# Allegro board A733_REF_LPDDR5_315BALL_32X1_D6L_V1_0_20240702.brd
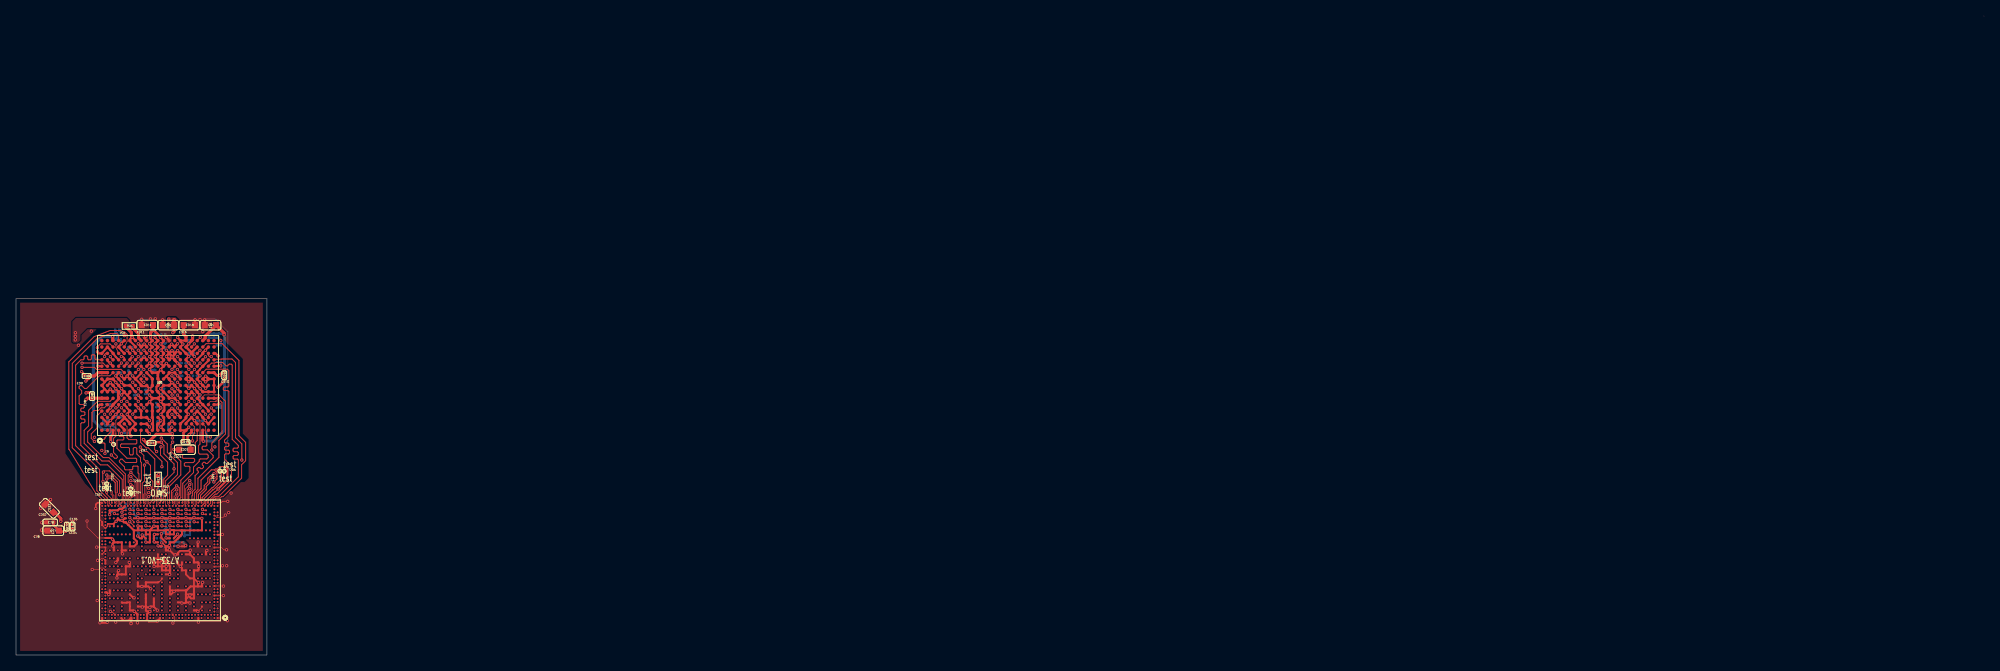
[diagram p0: board, top side]
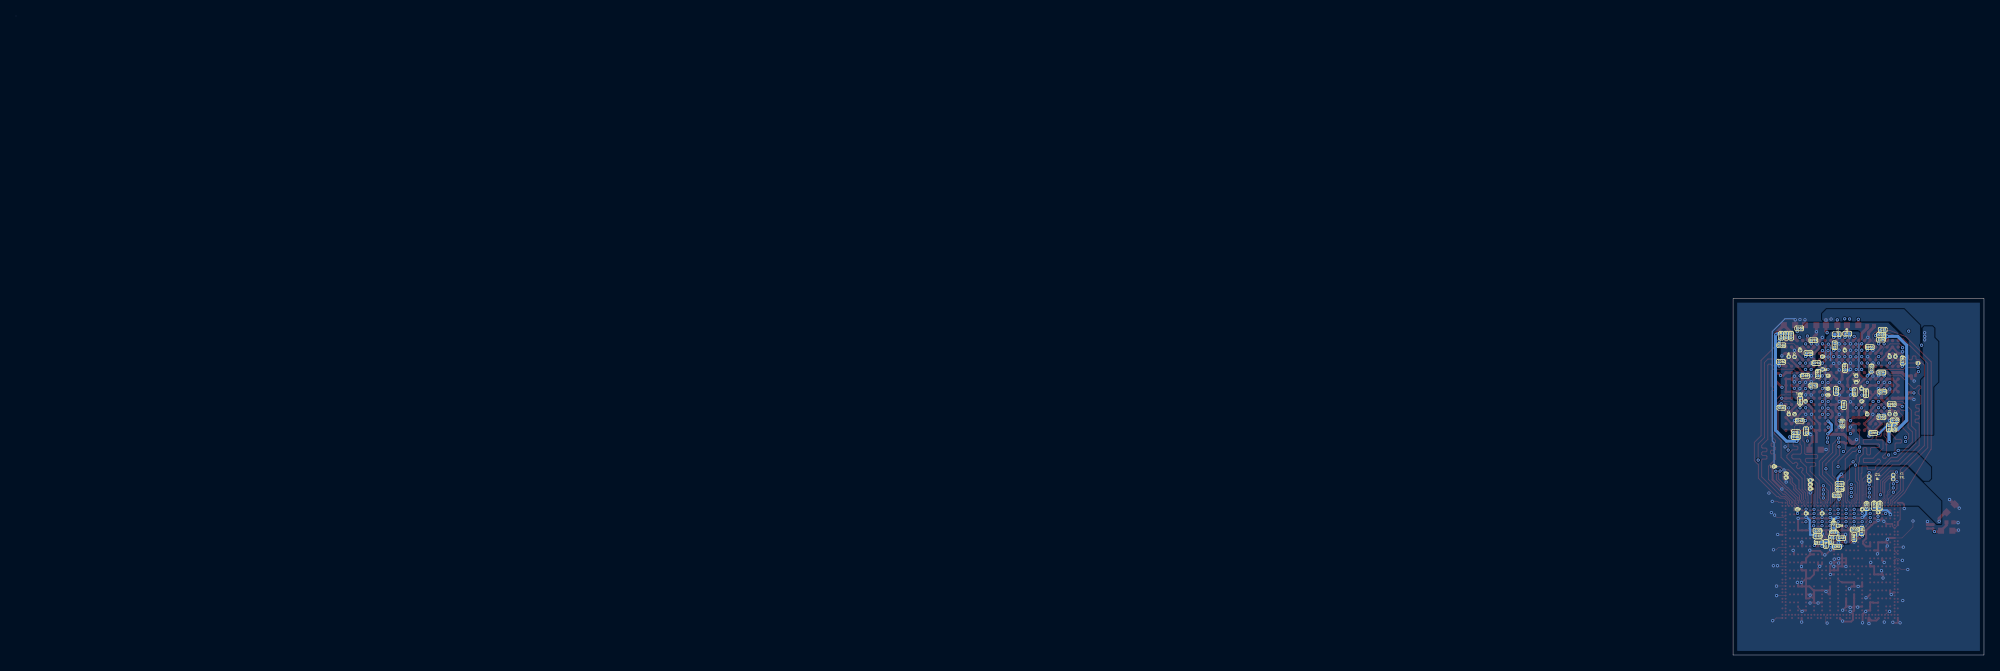
[diagram p1: board, bottom side, seen from below]

Outline 245.57 x 79.82 mm; copper layers: TOP, L2GND, L3, L4, L5GND, BOTTOM. Coordinates in mm from the lower left corner of the outline.
Outline path: 245.57,79.82 245.57,79.81 ; 0,44.52 0,0 31.31,0 31.31,44.52 0,44.52

## Design rules (mm)
net group WCK0-A: nets WCK0N-A WCK0P-A
net group WCK0-B: nets WCK0N-B WCK0P-B
net group WCK1-A: nets WCK1N-A WCK1P-A
net group WCK1-B: nets WCK1N-B WCK1P-B

## Placement (name value [footprint] x y rotation side)
C77  22uF  [C0603]  4.65 15.53 180 top
C78  4.7uF  [C0402]  4.26 16.57 180 top
C79  1uF  [C0201]  19.73 13.88 90 bottom
C80  1uF  [C0201]  16.17 14.71 270 bottom
C81  100nF  [C0201]  15.27 15.48 90 bottom
C82  100nF  [C0201]  20.63 14.08 180 bottom
C83  2.2uF  [C0201]  18.33 13.52 0 bottom
C134  1uF  [C0201]  7.05 16.05 90 top
C135  1uF  [C0201]  6.34 16.04 90 top
CD1  10uF  [C0603]  24.27 41.2 180 top
CD2  100nF  [C0201]  12.64 40.63 0 bottom
CD3  100nF  [C0201]  23.49 27.23 0 bottom
CD4  100nF  [C0201]  11.17 28.42 90 bottom
CD5  100nF  [C0201]  23.49 27.84 0 bottom
CD6  10uF  [C0603]  19.01 41.21 180 top
CD7  4.7uF  [C0201]  16.9 26.47 0 top
CD8  2.2uF  [C0201]  9.48 32.33 90 top
CD9  100nF  [C0201]  8.8 34.86 180 top
CD10  100nF  [C0201]  25.99 34.95 270 top
CD11  10uF  [C0603]  16.39 41.21 180 top
CD12  4.7uF  [C0201]  16.12 32.86 90 bottom
CD13  2.2uF  [C0201]  18.38 40.07 0 bottom
CD14  100nF  [C0201]  18.63 38.68 270 bottom
CD15  100nF  [C0201]  17.35 35.84 90 bottom
CD16  10uF  [C0603]  21.62 41.2 0 top
CD17  4.7uF  [C0201]  22.21 27.96 270 bottom
CD18  2.2uF  [C0201]  14.04 35.76 270 bottom
CD19  100nF  [C0201]  21.29 39.32 0 bottom
CD20  100nF  [C0201]  11.16 29.31 180 bottom
CD21  10uF  [C0603]  21.07 25.64 0 top
CD22  4.7uF  [C0201]  18.38 19.95 180 bottom
CD23  2.2uF  [C0201]  20.77 14.85 0 bottom
CD24  100nF  [C0201]  19.12 14.39 270 bottom
CD25  100nF  [C0201]  20.77 15.53 0 bottom
CD26  1uF  [C0201]  18.76 16.15 90 bottom
CD27  100nF  [C0201]  18.75 15.25 0 bottom
CD32  10uF  [C0603]  4.16 18.32 135 top
CD33  4.7uF  [C0201]  13.71 18.63 270 bottom
CD34  2.2uF  [C0201]  17.82 14.59 0 bottom
CD35  100nF  [C0201]  14.65 18.58 270 bottom
CD36  100nF  [C0201]  18 20.73 0 bottom
CD37  100nF  [C0201]  11.85 28.42 90 bottom
CD38  100nF  [C0201]  25.31 39.88 270 bottom
CD39  100nF  [C0201]  12.84 40 0 bottom
CD40  100nF  [C0201]  24.67 39.89 270 bottom
CD41  100nF  [C0201]  12.84 39.4 0 bottom
CD42  100nF  [C0201]  24.06 39.89 270 bottom
CD43  100nF  [C0201]  21.31 33.65 0 bottom
CD44  100nF  [C0201]  12.81 35.27 180 bottom
CD45  100nF  [C0201]  12.68 32.9 180 bottom
CD46  100nF  [C0201]  17.66 28.9 90 bottom
CD47  100nF  [C0201]  18.47 32.98 90 bottom
CD48  100nF  [C0201]  17.06 40.14 0 bottom
CD49  100nF  [C0201]  21.15 26.63 0 top
CD50  100nF  [C0201]  21.9 37.72 0 bottom
CD51  100nF  [C0201]  12.8 29.7 0 bottom
CD52  100nF  [C0201]  23 29.26 180 bottom
CD53  100nF  [C0201]  14.25 38.46 0 bottom
CD54  100nF  [C0201]  20.92 36.46 180 bottom
CD55  1uF  [C0201]  16.14 15.66 180 bottom
CD56  1uF  [C0201]  13.01 18.63 270 bottom
CD57  1uF  [C0201]  18.01 21.38 0 bottom
CD58  2.2uF  [C0201]  22.94 31.79 90 bottom
CD59  1uF  [C0201]  23.06 40.79 0 bottom
CD60  1uF  [C0201]  25.32 36.61 0 bottom
CD61  1uF  [C0201]  25.28 30.89 0 bottom
CD62  1uF  [C0201]  10.15 36.77 270 bottom
CD63  2.2uF  [C0201]  11.51 31.32 0 bottom
CD64  100nF  [C0201]  13.82 27.74 180 bottom
CD65  100nF  [C0201]  25.29 38.69 0 bottom
CD66  1uF  [C0201]  14.72 32.7 270 bottom
CD67  1uF  [C0201]  17.49 31.23 270 bottom
CD68  1uF  [C0201]  20.73 35.12 270 bottom
CD69  1uF  [C0201]  22.33 34.88 0 bottom
RD1  240R-1%  [R0402]  14.15 41.11 180 top
RD2  120R-1%  [R0402]  17.73 21.93 90 top
T3  test  [TP30]  13.21 17.84 0 bottom
T4  test  [TP30]  15.2 18.19 0 bottom
T5  test  [TP30]  22.26 31.68 0 bottom
T6  test  [TP30]  23.64 30.08 0 bottom
T7  test  [TP30]  11.32 22.48 0 bottom
T8  test  [TP30]  14.32 21.78 0 bottom
T9  test  [TP30]  12.17 26.31 180 top
T10  test  [TP30]  24.36 30.09 0 bottom
T11  test  [TP30]  11.32 21.97 0 bottom
T12  test  [TP30]  14.32 22.28 0 bottom
T13  test  [TP30]  11.77 30.09 0 bottom
T14  test  [TP30]  8.24 36.45 0 bottom
T15  test  [TP30]  20.2 17.69 0 bottom
T16  test  [TP30]  22.2 17.7 0 bottom
T17  test  [TP30]  11.05 30.07 0 bottom
T18  test  [TP30]  11.77 37.27 0 bottom
T19  test  [TP30]  21.68 21.27 0 bottom
T20  test  [TP30]  24.7 22.15 0 bottom
T21  test  [TP30]  22.95 38.06 0 bottom
T22  test  [TP30]  11.05 37.28 0 bottom
T23  test  [TP30]  23.64 37.25 0 bottom
T24  test  [TP30]  17.35 38.06 0 bottom
T26  test  [TP30]  24.36 37.27 0 bottom
T27  SATO  [TP30]  17.89 20.26 180 top
T28  SDTO  [TP30]  18.2 16.13 180 bottom
T29  test  [TP30]  14.57 30.08 0 bottom
T30  test  [TP30]  20.16 37.27 0 bottom
T33  test  [TP30]  24.7 22.66 0 bottom
T34  test  [TP30]  15.28 33.27 0 bottom
T35  test  [TP30]  19.45 34.88 0 bottom
T36  test  [TP30]  21.68 20.76 0 bottom
T37  test  [TP30]  15.26 31.69 0 bottom
T38  test  [TP30]  20.14 35.67 0 bottom
T39  test  [TP30]  15.94 34.87 0 bottom
T179  test  [TP30]  21.68 21.78 180 bottom
T180  test  [TP30]  19.47 32.47 180 bottom
T181  test  [TP30]  19.46 33.26 180 bottom
T182  test  [TP30]  15.94 34.07 180 bottom
T183  test  [TP30]  22.96 32.48 180 bottom
T199  test  [TP30]  26.19 23.55 180 bottom
T200  test  [TP30]  23.27 18.19 180 bottom
T201  test  [TP30]  11.32 20.87 0 top
T202  test  [TP30]  11.31 21.38 0 top
T203  test  [TP30]  14.3 20.76 0 top
T204  test  [TP30]  14.31 20.25 0 top
T205  test  [TP30]  25.45 22.98 0 top
T206  test  [TP30]  25.97 22.96 0 top
U1  A733-V0.1  [BGA570P40_50B1500_1500H95]  17.95 11.82 180 top
UD1  LPDDR5_FBGA315  [BGA315P70_80B1500_1240H110]  17.71 33.67 90 top

## Library data of the parts
C77-C83 C134 C135 CD1-CD27 CD32-CD69 = C-C0402
RD1 RD2 = R-R0402-1%
T3-T24 T26-T30 T33-T39 T179-T183 T199-T206 = TestPoint-on wire
U1 = A733-V1.0
UD1 = LPDDR5_FBGA315

## Footprints (pads in the part's own frame, mm; a bottom-side part is the same pattern mirrored in y, then rotated)
BGA315P70_80B1500_1240H110
  round 0.43 smd: A1(-5.6,7) A2(-4.8,7) A3(-4,7) A4(-3.2,7) A5(-2.4,7) A6(-1.6,7) A7(-0.8,7) A8(0,7) A9(0.8,7) A10(1.6,7) A11(2.4,7) A12(3.2,7) A13(4,7) A14(4.8,7) A15(5.6,7) AA1(-5.6,-7) AA2(-4.8,-7) AA3(-4,-7) AA4(-3.2,-7) AA5(-2.4,-7) AA6(-1.6,-7) AA7(-0.8,-7) AA8(0,-7) AA9(0.8,-7) AA10(1.6,-7) AA11(2.4,-7) AA12(3.2,-7) AA13(4,-7) AA14(4.8,-7) AA15(5.6,-7) B1(-5.6,6.3) B2(-4.8,6.3) B3(-4,6.3) B4(-3.2,6.3) B5(-2.4,6.3) B6(-1.6,6.3) B7(-0.8,6.3) B8(0,6.3) B9(0.8,6.3) B10(1.6,6.3) B11(2.4,6.3) B12(3.2,6.3) B13(4,6.3) B14(4.8,6.3) B15(5.6,6.3) C1(-5.6,5.6) C2(-4.8,5.6) C3(-4,5.6) C4(-3.2,5.6) C5(-2.4,5.6) C6(-1.6,5.6) C7(-0.8,5.6) C8(0,5.6) C9(0.8,5.6) C10(1.6,5.6) C11(2.4,5.6) C12(3.2,5.6) C13(4,5.6) C14(4.8,5.6) C15(5.6,5.6) D1(-5.6,4.9) D2(-4.8,4.9) D3(-4,4.9) D4(-3.2,4.9) D5(-2.4,4.9) D6(-1.6,4.9) D7(-0.8,4.9) D8(0,4.9) D9(0.8,4.9) D10(1.6,4.9) D11(2.4,4.9) D12(3.2,4.9) D13(4,4.9) D14(4.8,4.9) D15(5.6,4.9) E1(-5.6,4.2) E2(-4.8,4.2) E3(-4,4.2) E4(-3.2,4.2) E5(-2.4,4.2) E6(-1.6,4.2) E7(-0.8,4.2) E8(0,4.2) E9(0.8,4.2) E10(1.6,4.2) E11(2.4,4.2) E12(3.2,4.2) E13(4,4.2) E14(4.8,4.2) E15(5.6,4.2) F1(-5.6,3.5) F2(-4.8,3.5) F3(-4,3.5) F4(-3.2,3.5) F5(-2.4,3.5) F6(-1.6,3.5) F7(-0.8,3.5) F8(0,3.5) F9(0.8,3.5) F10(1.6,3.5) F11(2.4,3.5) F12(3.2,3.5) F13(4,3.5) F14(4.8,3.5) F15(5.6,3.5) G1(-5.6,2.8) G2(-4.8,2.8) G3(-4,2.8) G4(-3.2,2.8) G5(-2.4,2.8) G6(-1.6,2.8) G7(-0.8,2.8) G8(0,2.8) G9(0.8,2.8) G10(1.6,2.8) G11(2.4,2.8) G12(3.2,2.8) G13(4,2.8) G14(4.8,2.8) G15(5.6,2.8) H1(-5.6,2.1) H2(-4.8,2.1) H3(-4,2.1) H4(-3.2,2.1) H5(-2.4,2.1) H6(-1.6,2.1) H7(-0.8,2.1) H8(0,2.1) H9(0.8,2.1) H10(1.6,2.1) H11(2.4,2.1) H12(3.2,2.1) H13(4,2.1) H14(4.8,2.1) H15(5.6,2.1) J1(-5.6,1.4) J2(-4.8,1.4) J3(-4,1.4) J4(-3.2,1.4) J5(-2.4,1.4) J6(-1.6,1.4) J7(-0.8,1.4) J8(0,1.4) J9(0.8,1.4) J10(1.6,1.4) J11(2.4,1.4) J12(3.2,1.4) J13(4,1.4) J14(4.8,1.4) J15(5.6,1.4) K1(-5.6,0.7) K2(-4.8,0.7) K3(-4,0.7) K4(-3.2,0.7) K5(-2.4,0.7) K6(-1.6,0.7) K7(-0.8,0.7) K8(0,0.7) K9(0.8,0.7) K10(1.6,0.7) K11(2.4,0.7) K12(3.2,0.7) K13(4,0.7) K14(4.8,0.7) K15(5.6,0.7) L1(-5.6,0) L2(-4.8,0) L3(-4,0) L4(-3.2,0) L5(-2.4,0) L6(-1.6,0) L7(-0.8,0) L8(0,0) L9(0.8,0) L10(1.6,0) L11(2.4,0) L12(3.2,0) L13(4,0) L14(4.8,0) L15(5.6,0) M1(-5.6,-0.7) M2(-4.8,-0.7) M3(-4,-0.7) M4(-3.2,-0.7) M5(-2.4,-0.7) M6(-1.6,-0.7) M7(-0.8,-0.7) M8(0,-0.7) M9(0.8,-0.7) M10(1.6,-0.7) M11(2.4,-0.7) M12(3.2,-0.7) M13(4,-0.7) M14(4.8,-0.7) M15(5.6,-0.7) N1(-5.6,-1.4) N2(-4.8,-1.4) N3(-4,-1.4) N4(-3.2,-1.4) N5(-2.4,-1.4) N6(-1.6,-1.4) N7(-0.8,-1.4) N8(0,-1.4) N9(0.8,-1.4) N10(1.6,-1.4) N11(2.4,-1.4) N12(3.2,-1.4) N13(4,-1.4) N14(4.8,-1.4) N15(5.6,-1.4) P1(-5.6,-2.1) P2(-4.8,-2.1) P3(-4,-2.1) P4(-3.2,-2.1) P5(-2.4,-2.1) P6(-1.6,-2.1) P7(-0.8,-2.1) P8(0,-2.1) P9(0.8,-2.1) P10(1.6,-2.1) P11(2.4,-2.1) P12(3.2,-2.1) P13(4,-2.1) P14(4.8,-2.1) P15(5.6,-2.1) R1(-5.6,-2.8) R2(-4.8,-2.8) R3(-4,-2.8) R4(-3.2,-2.8) R5(-2.4,-2.8) R6(-1.6,-2.8) R7(-0.8,-2.8) R8(0,-2.8) R9(0.8,-2.8) R10(1.6,-2.8) R11(2.4,-2.8) R12(3.2,-2.8) R13(4,-2.8) R14(4.8,-2.8) R15(5.6,-2.8) T1(-5.6,-3.5) T2(-4.8,-3.5) T3(-4,-3.5) T4(-3.2,-3.5) T5(-2.4,-3.5) T6(-1.6,-3.5) T7(-0.8,-3.5) T8(0,-3.5) T9(0.8,-3.5) T10(1.6,-3.5) T11(2.4,-3.5) T12(3.2,-3.5) T13(4,-3.5) T14(4.8,-3.5) T15(5.6,-3.5) U1(-5.6,-4.2) U2(-4.8,-4.2) U3(-4,-4.2) U4(-3.2,-4.2) U5(-2.4,-4.2) U6(-1.6,-4.2) U7(-0.8,-4.2) U8(0,-4.2) U9(0.8,-4.2) U10(1.6,-4.2) U11(2.4,-4.2) U12(3.2,-4.2) U13(4,-4.2) U14(4.8,-4.2) U15(5.6,-4.2) V1(-5.6,-4.9) V2(-4.8,-4.9) V3(-4,-4.9) V4(-3.2,-4.9) V5(-2.4,-4.9) V6(-1.6,-4.9) V7(-0.8,-4.9) V8(0,-4.9) V9(0.8,-4.9) V10(1.6,-4.9) V11(2.4,-4.9) V12(3.2,-4.9) V13(4,-4.9) V14(4.8,-4.9) V15(5.6,-4.9) W1(-5.6,-5.6) W2(-4.8,-5.6) W3(-4,-5.6) W4(-3.2,-5.6) W5(-2.4,-5.6) W6(-1.6,-5.6) W7(-0.8,-5.6) W8(0,-5.6) W9(0.8,-5.6) W10(1.6,-5.6) W11(2.4,-5.6) W12(3.2,-5.6) W13(4,-5.6) W14(4.8,-5.6) W15(5.6,-5.6) Y1(-5.6,-6.3) Y2(-4.8,-6.3) Y3(-4,-6.3) Y4(-3.2,-6.3) Y5(-2.4,-6.3) Y6(-1.6,-6.3) Y7(-0.8,-6.3) Y8(0,-6.3) Y9(0.8,-6.3) Y10(1.6,-6.3) Y11(2.4,-6.3) Y12(3.2,-6.3) Y13(4,-6.3) Y14(4.8,-6.3) Y15(5.6,-6.3)
BGA570P40_50B1500_1500H95
  round 0.25 smd: 1A1(-6.25,6.25) 1A3(-5.25,6.25) 1A5(-4.25,6.25) 1A7(-3.25,6.25) 1A9(-2.25,6.25) 1A11(-1.25,6.25) 1A13(-0.25,6.25) 1A15(0.75,6.25) 1A17(1.75,6.25) 1A19(2.75,6.25) 1A21(3.75,6.25) 1A23(4.75,6.25) 1A25(5.75,6.25) 1AA1(-6.25,-3.75) 1AA2(-5.75,-3.75) 1AA3(-5.25,-3.75) 1AA4(-4.75,-3.75) 1AA5(-4.25,-3.75) 1AA6(-3.75,-3.75) 1AA8(-2.75,-3.75) 1AA10(-1.75,-3.75) 1AA12(-0.75,-3.75) 1AA14(0.25,-3.75) 1AA16(1.25,-3.75) 1AA17(1.75,-3.75) 1AA18(2.25,-3.75) 1AA20(3.25,-3.75) 1AB6(-3.75,-4.25) 1AB8(-2.75,-4.25) 1AB10(-1.75,-4.25) 1AB12(-0.75,-4.25) 1AB14(0.25,-4.25) 1AB16(1.25,-4.25) 1AB18(2.25,-4.25) 1AB20(3.25,-4.25) 1AB23(4.75,-4.25) 1AB24(5.25,-4.25) 1AB25(5.75,-4.25) 1AB26(6.25,-4.25) 1AC1(-6.25,-4.75) 1AC2(-5.75,-4.75) 1AC3(-5.25,-4.75) 1AC4(-4.75,-4.75) 1AC6(-3.75,-4.75) 1AC8(-2.75,-4.75) 1AC10(-1.75,-4.75) 1AC12(-0.75,-4.75) 1AC14(0.25,-4.75) 1AC16(1.25,-4.75) 1AC18(2.25,-4.75) 1AC20(3.25,-4.75) 1AC22(4.25,-4.75) 1AD4(-4.75,-5.25) 1AD6(-3.75,-5.25) 1AD8(-2.75,-5.25) 1AD10(-1.75,-5.25) 1AD12(-0.75,-5.25) 1AD14(0.25,-5.25) 1AD16(1.25,-5.25) 1AD18(2.25,-5.25) 1AD20(3.25,-5.25) 1AD22(4.25,-5.25) 1AD24(5.25,-5.25) 1AD25(5.75,-5.25) 1AD26(6.25,-5.25) 1AE1(-6.25,-5.75) 1AE2(-5.75,-5.75) 1AE4(-4.75,-5.75) 1AE6(-3.75,-5.75) 1AE8(-2.75,-5.75) 1AE10(-1.75,-5.75) 1AE12(-0.75,-5.75) 1AE14(0.25,-5.75) 1AE16(1.25,-5.75) 1AE18(2.25,-5.75) 1AE20(3.25,-5.75) 1AE22(4.25,-5.75) 1AE24(5.25,-5.75) 1AF2(-5.75,-6.25) 1AF4(-4.75,-6.25) 1AF6(-3.75,-6.25) 1AF8(-2.75,-6.25) 1AF10(-1.75,-6.25) 1AF12(-0.75,-6.25) 1AF14(0.25,-6.25) 1AF16(1.25,-6.25) 1AF18(2.25,-6.25) 1AF20(3.25,-6.25) 1AF22(4.25,-6.25) 1AF24(5.25,-6.25) 1AF26(6.25,-6.25) 1B3(-5.25,5.75) 1B5(-4.25,5.75) 1B7(-3.25,5.75) 1B9(-2.25,5.75) 1B11(-1.25,5.75) 1B13(-0.25,5.75) 1B15(0.75,5.75) 1B17(1.75,5.75) 1B19(2.75,5.75) 1B21(3.75,5.75) 1B23(4.75,5.75) 1B25(5.75,5.75) 1B26(6.25,5.75) 1C1(-6.25,5.25) 1C2(-5.75,5.25) 1C3(-5.25,5.25) 1C5(-4.25,5.25) 1C7(-3.25,5.25) 1C9(-2.25,5.25) 1C11(-1.25,5.25) 1C13(-0.25,5.25) 1C15(0.75,5.25) 1C17(1.75,5.25) 1C19(2.75,5.25) 1C21(3.75,5.25) 1C23(4.75,5.25) 1D5(-4.25,4.75) 1D7(-3.25,4.75) 1D9(-2.25,4.75) 1D11(-1.25,4.75) 1D13(-0.25,4.75) 1D15(0.75,4.75) 1D17(1.75,4.75) 1D19(2.75,4.75) 1D21(3.75,4.75) 1D23(4.75,4.75) 1D24(5.25,4.75) 1D25(5.75,4.75) 1D26(6.25,4.75) 1E1(-6.25,4.25) 1E2(-5.75,4.25) 1E3(-5.25,4.25) 1E4(-4.75,4.25) 1E5(-4.25,4.25) 1E7(-3.25,4.25) 1E9(-2.25,4.25) 1E11(-1.25,4.25) 1E13(-0.25,4.25) 1E15(0.75,4.25) 1E17(1.75,4.25) 1E19(2.75,4.25) 1E21(3.75,4.25) 1F7(-3.25,3.75) 1F9(-2.25,3.75) 1F11(-1.25,3.75) 1F13(-0.25,3.75) 1F15(0.75,3.75) 1F17(1.75,3.75) 1F19(2.75,3.75) 1F21(3.75,3.75) 1F22(4.25,3.75) 1F23(4.75,3.75) 1F24(5.25,3.75) 1F25(5.75,3.75) 1F26(6.25,3.75) 1G1(-6.25,3.25) 1G2(-5.75,3.25) 1G3(-5.25,3.25) 1G4(-4.75,3.25) 1G5(-4.25,3.25) 1G7(-3.25,3.25) 1G9(-2.25,3.25) 1G11(-1.25,3.25) 1G13(-0.25,3.25) 1G15(0.75,3.25) 1G17(1.75,3.25) 1G19(2.75,3.25) 1H11(-1.25,2.75) 1H13(-0.25,2.75) 1H14(0.25,2.75) 1H17(1.75,2.75) 1H19(2.75,2.75) 1H21(3.75,2.75) 1H22(4.25,2.75) 1H23(4.75,2.75) 1H24(5.25,2.75) 1H25(5.75,2.75) 1H26(6.25,2.75) 1J1(-6.25,2.25) 1J2(-5.75,2.25) 1J3(-5.25,2.25) 1J4(-4.75,2.25) 1J5(-4.25,2.25) 1J6(-3.75,2.25) 1J9(-2.25,2.25) 1J10(-1.75,2.25) 1J11(-1.25,2.25) 1J13(-0.25,2.25) 1J18(2.25,2.25) 1J19(2.75,2.25) 1J21(3.75,2.25) 1K9(-2.25,1.75) 1K12(-0.75,1.75) 1K13(-0.25,1.75) 1K14(0.25,1.75) 1K15(0.75,1.75) 1K16(1.25,1.75) 1K17(1.75,1.75) 1K19(2.75,1.75) 1K21(3.75,1.75) 1K22(4.25,1.75) 1K23(4.75,1.75) 1K24(5.25,1.75) 1K25(5.75,1.75) 1K26(6.25,1.75) 1L1(-6.25,1.25) 1L2(-5.75,1.25) 1L3(-5.25,1.25) 1L4(-4.75,1.25) 1L5(-4.25,1.25) 1L6(-3.75,1.25) 1L7(-3.25,1.25) 1L8(-2.75,1.25) 1L9(-2.25,1.25) 1L10(-1.75,1.25) 1L11(-1.25,1.25) 1L12(-0.75,1.25) 1L13(-0.25,1.25) 1L15(0.75,1.25) 1L16(1.25,1.25) 1L18(2.25,1.25) 1M10(-1.75,0.75) 1M11(-1.25,0.75) 1M13(-0.25,0.75) 1M14(0.25,0.75) 1M16(1.25,0.75) 1M17(1.75,0.75) 1M18(2.25,0.75) 1M19(2.75,0.75) 1M20(3.25,0.75) 1M21(3.75,0.75) 1M22(4.25,0.75) 1M23(4.75,0.75) 1M24(5.25,0.75) 1M25(5.75,0.75) 1M26(6.25,0.75) 1N1(-6.25,0.25) 1N2(-5.75,0.25) 1N3(-5.25,0.25) 1N4(-4.75,0.25) 1N5(-4.25,0.25) 1N6(-3.75,0.25) 1N7(-3.25,0.25) 1N8(-2.75,0.25) 1N9(-2.25,0.25) 1N12(-0.75,0.25) 1N14(0.25,0.25) 1N15(0.75,0.25) 1P9(-2.25,-0.25) 1P14(0.25,-0.25) 1P15(0.75,-0.25) 1P17(1.75,-0.25) 1P18(2.25,-0.25) 1P19(2.75,-0.25) 1P21(3.75,-0.25) 1P22(4.25,-0.25) 1P23(4.75,-0.25) 1P24(5.25,-0.25) 1P25(5.75,-0.25) 1P26(6.25,-0.25) 1R1(-6.25,-0.75) 1R2(-5.75,-0.75) 1R3(-5.25,-0.75) 1R4(-4.75,-0.75) 1R5(-4.25,-0.75) 1R6(-3.75,-0.75) 1R7(-3.25,-0.75) 1R8(-2.75,-0.75) 1R9(-2.25,-0.75) 1R12(-0.75,-0.75) 1R13(-0.25,-0.75) 1R14(0.25,-0.75) 1T12(-0.75,-1.25) 1T15(0.75,-1.25) 1T16(1.25,-1.25) 1T17(1.75,-1.25) 1T18(2.25,-1.25) 1T20(3.25,-1.25) 1T21(3.75,-1.25) 1T22(4.25,-1.25) 1T23(4.75,-1.25) 1T24(5.25,-1.25) 1T25(5.75,-1.25) 1T26(6.25,-1.25) 1U1(-6.25,-1.75) 1U2(-5.75,-1.75) 1U3(-5.25,-1.75) 1U4(-4.75,-1.75) 1U5(-4.25,-1.75) 1U6(-3.75,-1.75) 1U8(-2.75,-1.75) 1U10(-1.75,-1.75) 1U12(-0.75,-1.75) 1U13(-0.25,-1.75) 1U18(2.25,-1.75) 1U21(3.75,-1.75) 1V8(-2.75,-2.25) 1V10(-1.75,-2.25) 1V11(-1.25,-2.25) 1V12(-0.75,-2.25) 1V14(0.25,-2.25) 1V16(1.25,-2.25) 1V18(2.25,-2.25) 1V20(3.25,-2.25) 1V21(3.75,-2.25) 1V22(4.25,-2.25) 1V23(4.75,-2.25) 1V24(5.25,-2.25) 1V25(5.75,-2.25) 1V26(6.25,-2.25) 1W1(-6.25,-2.75) 1W2(-5.75,-2.75) 1W3(-5.25,-2.75) 1W4(-4.75,-2.75) 1W5(-4.25,-2.75) 1W6(-3.75,-2.75) 1W9(-2.25,-2.75) 1W10(-1.75,-2.75) 1W11(-1.25,-2.75) 1W15(0.75,-2.75) 1W16(1.25,-2.75) 1W17(1.75,-2.75) 1W18(2.25,-2.75) 1W20(3.25,-2.75) 1Y8(-2.75,-3.25) 1Y10(-1.75,-3.25) 1Y11(-1.25,-3.25) 1Y12(-0.75,-3.25) 1Y14(0.25,-3.25) 1Y16(1.25,-3.25) 1Y17(1.75,-3.25) 1Y21(3.75,-3.25) 1Y22(4.25,-3.25) 1Y23(4.75,-3.25) 1Y24(5.25,-3.25) 1Y25(5.75,-3.25) 1Y26(6.25,-3.25) A1(-7.2,7.2) A2(-6.8,7.2) A4(-6,7.2) A6(-5.2,7.2) A7(-4.8,7.2) A9(-4,7.2) A10(-3.6,7.2) A12(-2.8,7.2) A13(-2.4,7.2) A15(-1.6,7.2) A16(-1.2,7.2) A18(-0.4,7.2) A19(0,7.2) A21(0.8,7.2) A22(1.2,7.2) A24(2,7.2) A25(2.4,7.2) A27(3.2,7.2) A28(3.6,7.2) A30(4.4,7.2) A31(4.8,7.2) A33(5.6,7.2) A34(6,7.2) A36(6.8,7.2) A37(7.2,7.2) AA1(-7.2,-0.8) AA2(-6.8,-0.8) AA36(6.8,-0.8) AA37(7.2,-0.8) AB1(-7.2,-1.2) AB2(-6.8,-1.2) AB36(6.8,-1.2) AB37(7.2,-1.2) AC2(-6.8,-1.6) AC36(6.8,-1.6) AD1(-7.2,-2) AD2(-6.8,-2) AD36(6.8,-2) AD37(7.2,-2) AE1(-7.2,-2.4) AE2(-6.8,-2.4) AE36(6.8,-2.4) AE37(7.2,-2.4) AF2(-6.8,-2.8) AF36(6.8,-2.8) AG1(-7.2,-3.2) AG2(-6.8,-3.2) AG36(6.8,-3.2) AG37(7.2,-3.2) AH1(-7.2,-3.6) AH2(-6.8,-3.6) AH36(6.8,-3.6) AH37(7.2,-3.6) AJ2(-6.8,-4) AJ36(6.8,-4) AK1(-7.2,-4.4) AK2(-6.8,-4.4) AK36(6.8,-4.4) AK37(7.2,-4.4) AL1(-7.2,-4.8) AL2(-6.8,-4.8) AL36(6.8,-4.8) AL37(7.2,-4.8) AM2(-6.8,-5.2) AM36(6.8,-5.2) AN1(-7.2,-5.6) AN2(-6.8,-5.6) AN36(6.8,-5.6) AN37(7.2,-5.6) AP1(-7.2,-6) AP2(-6.8,-6) AP36(6.8,-6) AP37(7.2,-6) AR2(-6.8,-6.4) AR36(6.8,-6.4) AT1(-7.2,-6.8) AT2(-6.8,-6.8) AT3(-6.4,-6.8) AT4(-6,-6.8) AT5(-5.6,-6.8) AT6(-5.2,-6.8) AT7(-4.8,-6.8) AT8(-4.4,-6.8) AT9(-4,-6.8) AT10(-3.6,-6.8) AT11(-3.2,-6.8) AT12(-2.8,-6.8) AT13(-2.4,-6.8) AT14(-2,-6.8) AT15(-1.6,-6.8) AT16(-1.2,-6.8) AT17(-0.8,-6.8) AT18(-0.4,-6.8) AT19(0,-6.8) AT20(0.4,-6.8) AT21(0.8,-6.8) AT22(1.2,-6.8) AT23(1.6,-6.8) AT24(2,-6.8) AT25(2.4,-6.8) AT26(2.8,-6.8) AT27(3.2,-6.8) AT28(3.6,-6.8) AT29(4,-6.8) AT30(4.4,-6.8) AT31(4.8,-6.8) AT32(5.2,-6.8) AT33(5.6,-6.8) AT34(6,-6.8) AT35(6.4,-6.8) AT36(6.8,-6.8) AT37(7.2,-6.8) AU1(-7.2,-7.2) AU2(-6.8,-7.2) AU4(-6,-7.2) AU6(-5.2,-7.2) AU7(-4.8,-7.2) AU9(-4,-7.2) AU10(-3.6,-7.2) AU12(-2.8,-7.2) AU13(-2.4,-7.2) AU15(-1.6,-7.2) AU16(-1.2,-7.2) AU18(-0.4,-7.2) AU19(0,-7.2) AU21(0.8,-7.2) AU22(1.2,-7.2) AU24(2,-7.2) AU25(2.4,-7.2) AU27(3.2,-7.2) AU28(3.6,-7.2) AU30(4.4,-7.2) AU31(4.8,-7.2) AU33(5.6,-7.2) AU34(6,-7.2) AU36(6.8,-7.2) AU37(7.2,-7.2) B1(-7.2,6.8) B2(-6.8,6.8) B3(-6.4,6.8) B4(-6,6.8) B5(-5.6,6.8) B6(-5.2,6.8) B7(-4.8,6.8) B8(-4.4,6.8) B9(-4,6.8) B10(-3.6,6.8) B11(-3.2,6.8) B12(-2.8,6.8) B13(-2.4,6.8) B14(-2,6.8) B15(-1.6,6.8) B16(-1.2,6.8) B17(-0.8,6.8) B18(-0.4,6.8) B19(0,6.8) B20(0.4,6.8) B21(0.8,6.8) B22(1.2,6.8) B23(1.6,6.8) B24(2,6.8) B25(2.4,6.8) B26(2.8,6.8) B27(3.2,6.8) B28(3.6,6.8) B29(4,6.8) B30(4.4,6.8) B31(4.8,6.8) B32(5.2,6.8) B33(5.6,6.8) B34(6,6.8) B35(6.4,6.8) B36(6.8,6.8) B37(7.2,6.8) C2(-6.8,6.4) C36(6.8,6.4) D1(-7.2,6) D2(-6.8,6) D36(6.8,6) D37(7.2,6) E2(-6.8,5.6) E36(6.8,5.6) F1(-7.2,5.2) F2(-6.8,5.2) F36(6.8,5.2) F37(7.2,5.2) G1(-7.2,4.8) G2(-6.8,4.8) G36(6.8,4.8) G37(7.2,4.8) H2(-6.8,4.4) H36(6.8,4.4) J1(-7.2,4) J2(-6.8,4) J36(6.8,4) J37(7.2,4) K1(-7.2,3.6) K2(-6.8,3.6) K36(6.8,3.6) K37(7.2,3.6) L2(-6.8,3.2) L36(6.8,3.2) M1(-7.2,2.8) M2(-6.8,2.8) M36(6.8,2.8) M37(7.2,2.8) N1(-7.2,2.4) N2(-6.8,2.4) N36(6.8,2.4) N37(7.2,2.4) P2(-6.8,2) P36(6.8,2) R1(-7.2,1.6) R2(-6.8,1.6) R36(6.8,1.6) R37(7.2,1.6) T1(-7.2,1.2) T2(-6.8,1.2) T36(6.8,1.2) T37(7.2,1.2) U2(-6.8,0.8) U36(6.8,0.8) V1(-7.2,0.4) V2(-6.8,0.4) V36(6.8,0.4) V37(7.2,0.4) W1(-7.2,0) W2(-6.8,0) W36(6.8,0) W37(7.2,0) Y2(-6.8,-0.4) Y36(6.8,-0.4)
C0201
  rect 0.3x0.3 smd: 1(-0.25,0) 2(0.25,0)
C0402
  rect 0.5x0.5 smd: 1(-0.425,0) 2(0.425,0)
C0603
  rect 0.76x0.76 smd: 1(-0.71,0) 2(0.71,0)
R0402
  rect 0.5x0.5 smd: 1(-0.425,0) 2(0.425,0)
TP30
  round 0.3 smd: 1(0,0)

## Nets
GND: C77.2 C78.2 C79.2 C80.2 C81.2 C82.2 C83.2 C134.2 C135.2 CD1.2 CD2.2 CD3.2 CD4.2 CD5.2 CD6.2 CD7.2 CD8.2 CD9.2 CD10.2 CD11.2 CD12.2 CD13.2 CD14.2 CD15.2 CD16.2 CD17.2 CD18.2 CD19.2 CD20.2 CD21.2 CD22.2 CD23.2 CD24.2 CD25.2 CD26.2 CD27.2 CD32.2 CD33.2 CD34.2 CD35.2 CD36.2 CD37.2 CD38.2 CD39.2 CD40.2 CD41.2 CD42.2 CD43.2 CD44.2 CD45.2 CD46.2 CD47.2 CD48.2 CD49.2 CD50.2 CD51.2 CD52.2 CD53.2 CD54.2 CD55.2 CD56.2 CD57.2 CD58.2 CD59.2 CD60.2 CD61.2 CD62.2 CD63.2 CD64.2 CD65.2 CD66.2 CD67.2 CD68.2 CD69.2 RD2.2 T24.1(TP) T179.1(TP) T183.1(TP) T199.1(TP) U1.1A5(GND42) U1.1A17(GND43) U1.1A21(GND44) U1.1AA3(GND135) U1.1AA4(GND136) U1.1AA5(GND137) U1.1AA6(GND138) U1.1AA8(GND139) U1.1AA10(GND140) U1.1AA12(GND141) U1.1AA14(GND142) U1.1AA16(GND143) U1.1AA17(GND144) U1.1AA18(GND145) U1.1AA20(GND146) U1.1AB14(GND147) U1.1AB18(GND148) U1.1AB25(GND149) U1.1AC3(GND150) U1.1AC22(GND151) U1.1AD4(GND152) U1.1AD6(GND153) U1.1AD8(GND154) U1.1AD10(GND155) U1.1AD12(GND156) U1.1AD14(GND157) U1.1AD16(GND158) U1.1AD18(GND159) U1.1AD20(GND160) U1.1AD22(GND161) U1.1AD24(GND162) U1.1AF24(GND163) U1.1AF26(GND164) U1.1B3(GND45) U1.1B15(GND46) U1.1B17(GND47) U1.1B19(GND48) U1.1B21(GND49) U1.1C7(GND50) U1.1C9(GND51) U1.1C15(GND52) U1.1C17(GND53) U1.1C21(GND54) U1.1C23(GND55) U1.1D5(GND56) U1.1D7(GND57) U1.1D15(GND58) U1.1D17(GND59) U1.1E5(GND60) U1.1E7(GND61) U1.1E11(GND62) U1.1E17(GND63) U1.1E21(GND64) U1.1F7(GND65) U1.1F9(GND66) U1.1F11(GND67) U1.1F26(GND68) U1.1G3(GND69) U1.1G4(GND70) U1.1G5(GND71) U1.1G11(GND72) U1.1G17(GND73) U1.1G19(GND74) U1.1H14(GND75) U1.1H17(GND76) U1.1H19(GND77) U1.1J5(GND78) U1.1J6(GND79) U1.1J13(GND80) U1.1K12(GND81) U1.1K22(GND82) U1.1K23(GND83) U1.1K24(GND84) U1.1L4(GND85) U1.1L5(GND86) U1.1L7(GND87) U1.1L8(GND88) U1.1L11(GND89) U1.1L12(GND90) U1.1L13(GND91) U1.1M11(GND92) U1.1M13(GND93) U1.1M14(GND94) U1.1M21(GND95) U1.1M22(GND96) U1.1N4(GND97) U1.1N5(GND98) U1.1N8(GND99) U1.1N9(GND100) U1.1N12(GND101) U1.1N14(GND102) U1.1N15(GND103) U1.1P14(GND104) U1.1P15(GND105) U1.1P24(GND106) U1.1R2(GND107) U1.1R6(GND108) U1.1R7(GND109) U1.1R9(GND110) U1.1R14(GND111) U1.1T12(GND112) U1.1T22(GND113) U1.1T23(GND114) U1.1T25(GND115) U1.1U4(GND116) U1.1U12(GND117) U1.1U21(GND118) U1.1V10(GND119) U1.1V11(GND120) U1.1V16(GND121) U1.1V21(GND122) U1.1V23(GND123) U1.1V24(GND124) U1.1V25(GND125) U1.1W9(GND126) U1.1W16(GND127) U1.1W20(GND128) U1.1Y8(GND129) U1.1Y10(GND130) U1.1Y11(GND131) U1.1Y12(GND132) U1.1Y16(GND133) U1.1Y17(GND134) U1.A1(GND0) U1.A7(GND1) U1.A19(GND2) U1.A28(GND3) U1.A31(GND4) U1.A37(GND5) U1.AA37(GND17) U1.AB36(GND18) U1.AC2(GND19) U1.AC36(GND20) U1.AF36(GND21) U1.AG1(GND22) U1.AJ36(GND23) U1.AK37(GND24) U1.AL37(GND25) U1.AN2(GND26) U1.AT5(GND27) U1.AT8(GND28) U1.AT12(GND29) U1.AT13(GND30) U1.AT17(GND31) U1.AT24(GND32) U1.AT26(GND33) U1.AT30(GND34) U1.AU1(GND35) U1.AU10(GND36) U1.AU15(GND37) U1.AU19(GND38) U1.AU22(GND39) U1.AU34(GND40) U1.AU37(GND41) U1.B15(GND6) U1.B23(GND7) U1.B26(GND8) U1.B33(GND9) U1.H2(GND10) U1.J36(GND11) U1.L2(GND12) U1.T36(GND13) U1.U2(GND14) U1.V36(GND15) U1.W36(GND16) UD1.A5(VSS_0) UD1.A11(VSS_1) UD1.AA5(VSS_100) UD1.AA11(VSS_101) UD1.B4(VSS_2) UD1.B8(VSS_3) UD1.B12(VSS_4) UD1.C5(VSS_5) UD1.C8(VSS_6) UD1.C11(VSS_7) UD1.D2(VSS_8) UD1.D6(VSS_9) UD1.D7(VSS_10) UD1.D9(VSS_11) UD1.D10(VSS_12) UD1.D14(VSS_13) UD1.E1(VSS_14) UD1.E3(VSS_15) UD1.E8(VSS_16) UD1.E13(VSS_17) UD1.E15(VSS_18) UD1.F2(VSS_19) UD1.F8(VSS_20) UD1.F14(VSS_21) UD1.G3(VSS_22) UD1.G5(VSS_23) UD1.G7(VSS_24) UD1.G9(VSS_25) UD1.G11(VSS_26) UD1.G13(VSS_27) UD1.H3(VSS_28) UD1.H4(VSS_29) UD1.H6(VSS_30) UD1.H8(VSS_31) UD1.H10(VSS_32) UD1.H12(VSS_33) UD1.J1(VSS_34) UD1.J3(VSS_35) UD1.J7(VSS_36) UD1.J8(VSS_37) UD1.J10(VSS_38) UD1.J12(VSS_39) UD1.J13(VSS_40) UD1.J15(VSS_41) UD1.K7(VSS_42) UD1.K8(VSS_43) UD1.K9(VSS_44) UD1.L1(VSS_45) UD1.L2(VSS_46) UD1.L3(VSS_47) UD1.L4(VSS_48) UD1.L5(VSS_49) UD1.L11(VSS_50) UD1.L12(VSS_51) UD1.L13(VSS_52) UD1.L14(VSS_53) UD1.L15(VSS_54) UD1.M7(VSS_55) UD1.M8(VSS_56) UD1.M9(VSS_57) UD1.N1(VSS_58) UD1.N3(VSS_59) UD1.N4(VSS_60) UD1.N6(VSS_61) UD1.N8(VSS_62) UD1.N9(VSS_63) UD1.N10(VSS_64) UD1.N12(VSS_65) UD1.N13(VSS_66) UD1.N15(VSS_67) UD1.P4(VSS_68) UD1.P6(VSS_69) UD1.P8(VSS_70) UD1.P10(VSS_71) UD1.P12(VSS_72) UD1.P13(VSS_73) UD1.R3(VSS_74) UD1.R5(VSS_75) UD1.R7(VSS_76) UD1.R9(VSS_77) UD1.R11(VSS_78) UD1.R13(VSS_79) UD1.T2(VSS_80) UD1.T8(VSS_81) UD1.T14(VSS_82) UD1.U1(VSS_83) UD1.U3(VSS_84) UD1.U8(VSS_85) UD1.U13(VSS_86) UD1.U15(VSS_87) UD1.V2(VSS_88) UD1.V6(VSS_89) UD1.V7(VSS_90) UD1.V9(VSS_91) UD1.V10(VSS_92) UD1.V14(VSS_93) UD1.W5(VSS_94) UD1.W8(VSS_95) UD1.W11(VSS_96) UD1.Y4(VSS_97) UD1.Y8(VSS_98) UD1.Y12(VSS_99)
VCC09-VDD2L: CD6.1 CD7.1 CD8.1 CD9.1 CD10.1 UD1.A6(VDD2L_0) UD1.A10(VDD2L_1) UD1.AA6(VDD2L_14) UD1.AA10(VDD2L_15) UD1.B6(VDD2L_2) UD1.B10(VDD2L_3) UD1.H2(VDD2L_4) UD1.H14(VDD2L_5) UD1.J2(VDD2L_6) UD1.J14(VDD2L_7) UD1.N2(VDD2L_8) UD1.N14(VDD2L_9) UD1.P2(VDD2L_10) UD1.P14(VDD2L_11) UD1.Y6(VDD2L_12) UD1.Y10(VDD2L_13)
VCC-DRAM: CD11.1 CD12.1 CD13.1 CD14.1 CD15.1 CD21.1 CD22.1 CD23.1 CD24.1 CD25.1 CD43.1 CD44.1 CD45.1 CD46.1 CD47.1 CD48.1 CD66.1 CD67.1 CD68.1 CD69.1 U1.1W10(VCC-DRAM0) U1.1W11(VCC-DRAM1) UD1.A7(VDD2H_0) UD1.A8(VDD2H_1) UD1.A9(VDD2H_2) UD1.AA7(VDD2H_58) UD1.AA8(VDD2H_59) UD1.AA9(VDD2H_60) UD1.B7(VDD2H_3) UD1.B9(VDD2H_4) UD1.C7(VDD2H_5) UD1.C9(VDD2H_6) UD1.D8(VDD2H_7) UD1.E7(VDD2H_8) UD1.E9(VDD2H_9) UD1.F6(VDD2H_10) UD1.F7(VDD2H_11) UD1.F9(VDD2H_12) UD1.F10(VDD2H_13) UD1.J5(VDD2H_14) UD1.J11(VDD2H_15) UD1.K1(VDD2H_16) UD1.K2(VDD2H_17) UD1.K3(VDD2H_18) UD1.K4(VDD2H_19) UD1.K5(VDD2H_20) UD1.K6(VDD2H_21) UD1.K10(VDD2H_22) UD1.K11(VDD2H_23) UD1.K12(VDD2H_24) UD1.K13(VDD2H_25) UD1.K14(VDD2H_26) UD1.K15(VDD2H_27) UD1.L6(VDD2H_28) UD1.L7(VDD2H_29) UD1.L8(VDD2H_30) UD1.L9(VDD2H_31) UD1.L10(VDD2H_32) UD1.M1(VDD2H_33) UD1.M2(VDD2H_34) UD1.M3(VDD2H_35) UD1.M4(VDD2H_36) UD1.M5(VDD2H_37) UD1.M6(VDD2H_38) UD1.M10(VDD2H_39) UD1.M11(VDD2H_40) UD1.M12(VDD2H_41) UD1.M13(VDD2H_42) UD1.M14(VDD2H_43) UD1.M15(VDD2H_44) UD1.N5(VDD2H_45) UD1.N11(VDD2H_46) UD1.T6(VDD2H_47) UD1.T7(VDD2H_48) UD1.T9(VDD2H_49) UD1.T10(VDD2H_50) UD1.U7(VDD2H_51) UD1.U9(VDD2H_52) UD1.V8(VDD2H_53) UD1.W7(VDD2H_54) UD1.W9(VDD2H_55) UD1.Y7(VDD2H_56) UD1.Y9(VDD2H_57)
VCC-DRAML: CD32.1 CD33.1 CD34.1 CD35.1 CD36.1 CD55.1 CD56.1 CD57.1 U1.1V14(VCC-DRAML0) U1.1W15(VCC-DRAML1) U1.1Y14(VCC-DRAML2)
VCC-VDDQ: CD16.1 CD17.1 CD18.1 CD19.1 CD20.1 CD49.1 CD50.1 CD51.1 CD52.1 CD53.1 CD54.1 CD58.1 CD59.1 CD60.1 CD61.1 CD62.1 CD63.1 CD64.1 CD65.1 RD1.2 UD1.A3(VDDQ_0) UD1.A13(VDDQ_1) UD1.AA3(VDDQ_38) UD1.AA13(VDDQ_39) UD1.B2(VDDQ_2) UD1.B14(VDDQ_3) UD1.C3(VDDQ_4) UD1.C13(VDDQ_5) UD1.D4(VDDQ_6) UD1.D12(VDDQ_7) UD1.E5(VDDQ_8) UD1.E11(VDDQ_9) UD1.F1(VDDQ_10) UD1.F3(VDDQ_11) UD1.F4(VDDQ_12) UD1.F12(VDDQ_13) UD1.F13(VDDQ_14) UD1.F15(VDDQ_15) UD1.G1(VDDQ_16) UD1.G2(VDDQ_17) UD1.G14(VDDQ_18) UD1.G15(VDDQ_19) UD1.R1(VDDQ_20) UD1.R2(VDDQ_21) UD1.R14(VDDQ_22) UD1.R15(VDDQ_23) UD1.T1(VDDQ_24) UD1.T3(VDDQ_25) UD1.T4(VDDQ_26) UD1.T12(VDDQ_27) UD1.T13(VDDQ_28) UD1.T15(VDDQ_29) UD1.U5(VDDQ_30) UD1.U11(VDDQ_31) UD1.V4(VDDQ_32) UD1.V12(VDDQ_33) UD1.W3(VDDQ_34) UD1.W13(VDDQ_35) UD1.Y2(VDDQ_36) UD1.Y14(VDDQ_37)
VDD18-DRAM: CD26.1 CD27.1 U1.1V12(VDD18-DRAM)
VDD18-LPDDR: CD1.1 CD2.1 CD3.1 CD4.1 CD5.1 CD37.1 CD38.1 CD39.1 CD40.1 CD41.1 CD42.1 UD1.C1(VDD1_0) UD1.C15(VDD1_1) UD1.W1(VDD1_2) UD1.W15(VDD1_3)
VDD-DRAM: C77.1 C78.1 C79.1 C80.1 C81.1 C82.1 C83.1 C134.1 C135.1 U1.1U8(VDD-DRAM0) U1.1U13(VDD-DRAM1) U1.1V8(VDD-DRAM2) U1.1W17(VDD-DRAM3) U1.1W18(VDD-DRAM4)
SCA0-A: T29.1(TP) U1.1AC16(SCA3-A) UD1.G4(CA0_A)
SCA0-B: T30.1(TP) U1.1AE12(SCA1-B) UD1.R12(CA0_B)
SCA1-A: U1.AT21(SCS0-A) UD1.H5(CA1_A)
SCA1-B: U1.AU18(SCS0-B) UD1.P11(CA1_B)
SCA2-A: U1.1AB16(SCA4-A) UD1.G8(CA2_A)
SCA2-B: U1.1AB10(SCA4-B) UD1.R8(CA2_B)
SCA3-A: U1.1AC14(SCA0-A) UD1.H11(CA3_A)
SCA3-B: U1.1AF12(SCA0-B) UD1.P5(CA3_B)
SCA4-A: U1.1AF16(SCA2-A) UD1.G10(CA4_A)
SCA4-B: U1.1AF10(SCA3-B) UD1.R6(CA4_B)
SCA5-A: U1.1AE16(SCA5-A) UD1.H13(CA5_A)
SCA5-B: U1.1AC10(SCA5-B) UD1.P3(CA5_B)
SCA6-A: U1.1AE14(SCA1-A) UD1.G12(CA6_A)
SCA6-B: U1.1AE10(SCA2-B) UD1.R4(CA6_B)
SCKN-A: T39.1(TP) U1.AT22(SCKN-A) UD1.J9(CK_C_A)
SCKN-B: T180.1(TP) U1.AT15(SCKN-B) UD1.N7(CK_C_B)
SCKP-A: T182.1(TP) U1.AT23(SCKP-A) UD1.H9(CK_T_A)
SCKP-B: T181.1(TP) U1.AT14(SCKP-B) UD1.P7(CK_T_B)
SCS0-A: T34.1(TP) U1.AU24(SCKE0-A) UD1.H7(CS0_A)
SCS0-B: T35.1(TP) U1.AT16(SCKE0-B) UD1.P9(CS0_B)
SCS1-A: T37.1(TP) U1.AU21(SCKE1-A) UD1.G6(CS1_A)
SCS1-B: T38.1(TP) U1.AU16(SCKE1-B) UD1.R10(CS1_B)
SDQ0: T3.1(TP) T14.1(TP) U1.1AF22(SDQ0) UD1.B11(DQ12_A)
SDQ1: U1.AU31(SDQ1) UD1.C10(DQ13_A)
SDQ2: U1.1AC20(SDQ2) UD1.F11(DQ15_A)
SDQ3: U1.1AE22(SDQ3) UD1.C14(DQ9_A)
SDQ4: U1.AT35(SDQ4) UD1.D15(DQ8_A)
SDQ5: U1.AU36(SDQ5) UD1.E14(DQ10_A)
SDQ6: U1.1AB20(SDQ6) UD1.E10(DQ14_A)
SDQ7: U1.1AE24(SDQ7) UD1.D13(DQ11_A)
SDQ8: T4.1(TP) T9.1(TP) U1.1AF18(SDQ8) UD1.D3(DQ3_A)
SDQ9: U1.AU25(SDQ9) UD1.E2(DQ2_A)
SDQ10: U1.1AE18(SDQ10) UD1.C2(DQ1_A)
SDQ11: U1.AT25(SDQ11) UD1.D1(DQ0_A)
SDQ12: U1.1AE20(SDQ12) UD1.F5(DQ7_A)
SDQ13: U1.AT29(SDQ13) UD1.B5(DQ4_A)
SDQ14: U1.1AC18(SDQ14) UD1.E6(DQ6_A)
SDQ15: U1.AU30(SDQ15) UD1.C6(DQ5_A)
SDQ16: T5.1(TP) T15.1(TP) U1.1AE8(SDQ16) UD1.U6(DQ14_B)
SDQ17: U1.AU13(SDQ17) UD1.V1(DQ8_B)
SDQ18: U1.AU12(SDQ18) UD1.V3(DQ11_B)
SDQ19: U1.1AF8(SDQ19) UD1.T5(DQ15_B)
SDQ20: U1.AU9(SDQ20) UD1.W2(DQ9_B)
SDQ21: U1.1AB8(SDQ21) UD1.U2(DQ10_B)
SDQ22: U1.AT9(SDQ22) UD1.W6(DQ13_B)
SDQ23: U1.1AC6(SDQ23) UD1.Y5(DQ12_B)
SDQ24: T16.1(TP) T21.1(TP) U1.1AE4(SDQ24) UD1.V13(DQ3_B)
SDQ25: U1.1AF4(SDQ25) UD1.U10(DQ6_B)
SDQ26: U1.1AB6(SDQ26) UD1.T11(DQ7_B)
SDQ27: U1.1AC4(SDQ27) UD1.U14(DQ2_B)
SDQ28: U1.AT4(SDQ28) UD1.Y11(DQ4_B)
SDQ29: U1.AU4(SDQ29) UD1.W10(DQ5_B)
SDQ30: U1.1AE2(SDQ30) UD1.V15(DQ0_B)
SDQ31: U1.AT3(SDQ31) UD1.W14(DQ1_B)
SDQM0: U1.AT34(SDQM0) UD1.A12(DMI1_A)
SDQM1: U1.1AF20(SDQM1) UD1.A4(DMI0_A)
SDQM2: U1.1AC8(SDQM2) UD1.AA4(DMI1_B)
SDQM3: T200.1(TP) U1.1AF2(SDQM3) UD1.AA12(DMI0_B)
SDQS0N: T7.1(TP) T18.1(TP) U1.AT31(SDQS0N) UD1.C12(RDQS1_C_A)
SDQS0P: T11.1(TP) T22.1(TP) U1.AT32(SDQS0P) UD1.B13(RDQS1_T_A)
SDQS1N: T8.1(TP) T13.1(TP) U1.AU27(SDQS1N) UD1.C4(RDQS0_C_A)
SDQS1P: T12.1(TP) T17.1(TP) U1.AT27(SDQS1P) UD1.B3(RDQS0_T_A)
SDQS2N: T6.1(TP) T19.1(TP) U1.AT11(SDQS2N) UD1.W4(RDQS1_C_B)
SDQS2P: T10.1(TP) T36.1(TP) U1.AT10(SDQS2P) UD1.Y3(RDQS1_T_B)
SDQS3N: T20.1(TP) T23.1(TP) U1.AU7(SDQS3N) UD1.W12(RDQS0_C_B)
SDQS3P: T26.1(TP) T33.1(TP) U1.AT7(SDQS3P) UD1.Y13(RDQS0_T_B)
SRST: U1.1AC12(SRST) UD1.H1(RESET_N)
WCK0N-A: T201.1(TP) U1.AU33(WCK0N-A) UD1.D11(WCK1_C_A)
WCK0N-B: U1.1AF6(WCK0N-B) UD1.V5(WCK1_C_B)
WCK0P-A: T202.1(TP) U1.AT33(WCK0P-A) UD1.E12(WCK1_T_A)
WCK0P-B: U1.1AE6(WCK0P-B) UD1.U4(WCK1_T_B)
WCK1N-A: T203.1(TP) U1.AT28(WCK1N-A) UD1.D5(WCK0_C_A)
WCK1N-B: T206.1(TP) U1.AT6(WCK1N-B) UD1.V11(WCK0_C_B)
WCK1P-A: T204.1(TP) U1.AU28(WCK1P-A) UD1.E4(WCK0_T_A)
WCK1P-B: T205.1(TP) U1.AU6(WCK1P-B) UD1.U12(WCK0_T_B)
N16690963: RD1.1 UD1.H15(ZQ_A)
N16691273: RD2.1 U1.AT20(SZQ)
N16750069: T28.1(TP) U1.1AB12(SDTO)
N16750085: T27.1(TP) U1.AT19(SATO)

Pads without a net: U1 1A1 1A3 1A7 1A9 1A11 1A13 1A15 1A19 1A23 1A25 1AA1 1AA2 1AB23 1AB24 1AB26 1AC1 1AC2 1AD25 1AD26 1AE1 1AF14 1B5 1B7 1B9 1B11 1B13 1B23 1B25 1B26 1C1 1C2 1C3 1C5 1C11 1C13 1C19 1D9 1D11 1D13 1D19 1D21 1D23 1D24 1D25 1D26 1E1 1E2 1E3 1E4 1E9 1E13 1E15 1E19 1F13 1F15 1F17 1F19 1F21 1F22 1F23 1F24 1F25 1G1 1G2 1G7 1G9 1G13 1G15 1H11 1H13 1H21 1H22 1H23 1H24 1H25 1H26 1J1 1J2 1J3 1J4 1J9 1J10 1J11 1J18 1J19 1J21 1K9 1K13 1K14 1K15 1K16 1K17 1K19 1K21 1K25 1K26 1L1 1L2 1L3 1L6 1L9 1L10 1L15 1L16 1L18 1M10 1M16 1M17 1M18 1M19 1M20 1M23 1M24 1M25 1M26 1N1 1N2 1N3 1N6 1N7 1P9 1P17 1P18 1P19 1P21 1P22 1P23 1P25 1P26 1R1 1R3 1R4 1R5 1R8 1R12 1R13 1T15 1T16 1T17 1T18 1T20 1T21 1T24 1T26 1U1 1U2 1U3 1U5 1U6 1U10 1U18 1V18 1V20 1V22 1V26 1W1 1W2 1W3 1W4 1W5 1W6 1Y21 1Y22 1Y23 1Y24 1Y25 1Y26 A2 A4 A6 A9 A10 A12 A13 A15 A16 A18 A21 A22 A24 A25 A27 A30 A33 A34 A36 AA1 AA2 AA36 AB1 AB2 AB37 AD1 AD2 AD36 AD37 AE1 AE2 AE36 AE37 AF2 AG2 AG36 AG37 AH1 AH2 AH36 AH37 AJ2 AK1 AK2 AK36 AL1 AL2 AL36 AM2 AM36 AN1 AN36 AN37 AP1 AP2 AP36 AP37 AR2 AR36 AT1 AT2 AT18 AT36 AT37 AU2 B1 B2 B3 B4 B5 B6 B7 B8 B9 B10 B11 B12 B13 B14 B16 B17 B18 B19 B20 B21 B22 B24 B25 B27 B28 B29 B30 B31 B32 B34 B35 B36 B37 C2 C36 D1 D2 D36 D37 E2 E36 F1 F2 F36 F37 G1 G2 G36 G37 H36 J1 J2 J37 K1 K2 K36 K37 L36 M1 M2 M36 M37 N1 N2 N36 N37 P2 P36 R1 R2 R36 R37 T1 T2 T37 U36 V1 V2 V37 W1 W2 W37 Y2 Y36; UD1 A1 A2 A14 A15 AA1 AA2 AA14 AA15 B1 B15 J4 J6 P1 P15 Y1 Y15

## Via types
v1: diameter 0.406, hole 0.203, TOP to BOTTOM, 397 vias

## Routing (per net, layer and track width the routed paths; a pad name or vN(x,y) marks a point on that pad's centre or on a via; arc(x,y) is an arc through that point)
GND: length 379.7
  TOP w0.076: v1(26.27,13.14) 25.93,13.14 25.65,13.42 U1.AC2 ; v1(9.5,10.68) 10.34,10.68 10.53,10.86 10.91,10.86 U1.T36 ; U1.AF36 10.23,14.62 8.86,15.99 v1(8.86,16.74) ; U1.AN2 24.81,17.42 25.05,17.18 25.83,17.18 v1(26.13,17.47) ; v1(16.56,21.31) 16.15,21.31 16.03,21.19 16.03,20.2 15.92,20.08 15.92,19.49 16.2,19.21 16.2,18.96 16.19,18.95 16.19,18.92 15.95,18.68 U1.AT24 ; 15.15,21.98 15.15,21.98 15.15,19.93 15.15,19.93 15.15,19.23 15.15,19.23 U1.AT26 ; v1(20.04,19.61) 20.04,19.37 20.1,19.31 20.1,18.87 U1.AT13 U1.AT12 20.77,18.62 21,18.85 21,21.1 v1(21.68,21.78) 21.68,21.72 22,21.4 22,20.63 21.68,20.31 v1(21.68,20.26) ; v1(10.18,11.82) 10.42,11.82 10.65,12.06 10.9,12.06 11,11.96 ; v1(18.13,26.59) 18.13,26.54 18.16,26.51 ; U1.L2 25.86,8.62 25.87,8.61 v1(25.89,8.61) ; 22.54,19.42 22.36,19.24 22.36,18.63 U1.AT8 ; 18.67,19.7 18.67,18.7 U1.AT17 ; U1.U2 25.64,11.02 v1(25.76,11.15) ; U1.H2 v1(25.88,7.42) ; U1.B15 19.55,4.98 19.8,4.74 19.8,4.21 v1(19.57,3.99)
  TOP w0.102: 17.07,21.68 17.07,19.33 U1.AU22 ; v1(12.92,20.01) 12.92,21.76 11.68,22.99 11.05,22.99 v1(10.91,22.85) ; U1.AU34 11.95,19.31 11.9,19.36 11.9,19.51 11.32,20.09 11.32,20.32 v1(11.3,20.34) ; v1(16.56,19.78) 16.89,20.11 16.89,20.98 v1(16.56,21.31) ; 20.33,20.91 20.37,20.87 20.37,19.94 v1(20.04,19.61) ; 18.67,19.7 18.67,21.76 19.72,22.81 v1(19.72,23.26) ; 15.95,24.46 15.95,24.92 15.54,25.33 v1(15.54,25.44) ; 15.15,21.98 v1(14.33,22.8) 13.99,22.46 13.99,21.6 v1(14.32,21.27) 14.51,21.27 14.68,21.09 14.68,20.13 14.68,20.12 14.68,19.84 14.58,19.74 v1(14.3,19.74) ; U1.1B3 23.2,5.95 v1(22.7,5.45) ; v1(11.78,5.44) 11.93,5.44 U1.B33 ; U1.AU1 25.21,19.07 25.63,19.07 25.75,19.19 v1(26.42,19.19) ; v1(26.36,4.28) 26.27,4.38 26.16,4.38 25.92,4.62 U1.A1
  TOP w0.114: v1(19.72,23.26) 19.72,23.86 19.33,24.25 19.33,24.26 18.46,25.13 18.46,26.18 18.3,26.34 18.3,26.37 18.16,26.51 ; U1.W36 11.14,11.82 11,11.96 ; 22.51,5.57 22.56,5.57 22.69,5.45 v1(22.7,5.45) ; v1(11.3,20.34) 10.86,20.79 v1(10.86,21.67) 10.82,21.7 10.82,22.71 10.91,22.79 v1(10.91,22.85) ; UD1.T14 21.23,38.47 21.5,38.81 21.5,38.82 v1(21.55,38.86) ; 17.3,26.41 17.3,25.66 17.54,25.42 v1(17.54,25.41) ; U1.AU37 10.46,18.73 10.46,16.91 U1.AL37 ; 17.07,21.68 16.77,21.97 16.77,23.67 16.34,24.11 v1(16.34,24.13) 16.28,24.13 15.95,24.46 ; v1(18.07,19.46) 18.07,19.84 18.21,19.98 18.21,21.87 RD2.2 17.73,22.5 v1(17.8,22.57) ; U1.AB36 U1.AC36 11.09,13.48 v1(10.07,13.48) ; U1.AJ36 U1.AK37
  TOP w0.127: 22.54,19.42 22.54,20.22 23.09,20.77 23.09,21.84 24.38,23.13 24.9,23.13 ; 26.21,23.54 25.43,23.54 24.99,23.1 v1(24.95,23.1) 24.95,22.93 25.07,22.81 25.07,22.3 25.07,22 25.03,21.95 25.03,21.95 v1(24.68,21.61) ; U1.AU19 18.07,19.14 v1(18.07,19.46) ; U1.AJ36 11.44,16.1 11.44,16.37 11.45,16.39 ; v1(21.68,20.26) 21.68,20.18 21.55,20.05 U1.AU10 ; U1.1J13 18.2,9.54 18.2,9.54 18.2,9.52 18.19,9.51 18.19,9.45 17.9,9.15 17.85,9.15 17.83,9.14 17.78,9.14 U1.1H14 ; v1(25.22,20.73) 24.84,20.36 24.77,20.36 23.68,19.28 23.68,18.75 U1.AT5 ; U1.AU15 19.55,19.18 19.39,19.34 19.39,20.48 v1(20.04,21.13) 20.11,21.13 20.33,20.91 ; U1.AA37 U1.AB36
  TOP w0.178: v1(18.18,14) 18.27,14 U1.1U12
  TOP w0.203: v1(9.95,18.29) 9.95,18.79 10.18,19.02 U1.AU37 ; U1.1AB25 12.2,16.42 ; 12.2,16.42 12.16,16.37 11.44,16.37 ; 12.2,16.42 v1(12.49,16.7) ; 8.21,35.37 v1(8.19,35.39) ; UD1.P6 UD1.N6 ; U1.W36 U1.V36 ; UD1.N10 UD1.P10
  TOP w0.229: U1.1M14 U1.1M13 ; U1.1M14 U1.1N14 ; U1.1M14 17.23,11.07 v1(17.22,11.06) 17.2,11.08 U1.1N15 ; U1.1M13 18.73,11.07 ; U1.1M13 U1.1L13 U1.1L12 ; U1.1M13 18.2,11.42 v1(18.13,11.49) ; U1.B26 v1(15.15,4.02) ; v1(17.63,5.6) 17.2,6.03 U1.1B15 ; U1.1D7 21.29,7.07 v1(21.7,7.48) ; v1(21.7,7.48) 21.7,7.2 21.83,7.07 U1.1D5 ; v1(21.7,7.48) 21.61,7.57 U1.1E7 ; U1.1N15 U1.1P15 U1.1P14 ; U1.1N15 U1.1N14 ; U1.1G5 U1.1J5 22.7,9.07 v1(22.78,9.07) 22.7,9 U1.1G4 ; U1.1N12 19.07,11.57 v1(19.12,11.51) 19.12,11.15 U1.1M11 U1.1L11 ; U1.1N12 18.7,11.96 v1(18.69,11.97) 18.61,12.05 v1(18.13,12.05) ; U1.1N12 18.21,11.57 v1(18.13,11.49) ; U1.1N12 18.7,11.12 v1(18.74,11.08) 18.73,11.07 ; U1.A28 14.04,4.3 13.42,4.3 13.15,4.57 U1.A31 ; v1(18.2,17.17) 18.1,17.07 U1.1AD14 ; 18.73,11.07 18.7,11.05 U1.1L12 ; U1.1L12 U1.1L11 ; U1.1G11 U1.1F11 ; U1.1F11 19.58,8.07 v1(19.72,7.93) ; U1.1F11 U1.1E11 19.35,7.57 v1(19.72,7.93) ; U1.AK37 U1.AL37 ; U1.1Y17 U1.1Y16 U1.1AA16 ; v1(17.64,4.24) 17.58,4.18 16.56,4.18 16.35,4.39 U1.B23 ; U1.1AD10 20.1,17.07 v1(20.2,17.18) ; U1.1C17 U1.1B17 ; U1.1B17 16.18,6.05 15.82,6.05 v1(15.75,5.98) 15.68,6.05 15.22,6.05 U1.1B19 ; U1.1B17 U1.1A17 ; U1.1AA16 U1.1AA17 U1.1AA18 ; U1.1AA16 U1.1AA14 U1.1AA12 U1.1Y12 U1.1Y11 U1.1Y10 U1.1AA10 U1.1AA8 ; v1(19.72,7.93) 19.85,8.07 U1.1F9 U1.1F7 ; v1(23.19,17.07) 23.19,17.07 U1.1AD4 22.28,17.07 22.21,17.14 v1(22.21,17.18) 22.1,17.07 U1.1AD6 ; U1.1M22 U1.1K22 ; v1(18.13,11.49) 18.05,11.57 U1.1N14 ; v1(18.13,11.49) v1(18.13,12.05) ; v1(21.7,6.49) 21.62,6.57 U1.1C7 21.12,6.49 v1(20.7,6.49) 20.62,6.57 U1.1C9 ; U1.1N9 20.2,11.37 v1(20.49,11.08) ; 21.7,13.05 21.66,13.01 20.45,13.01 20.2,12.76 U1.1R9 ; U1.1N8 20.7,11.29 v1(20.49,11.08) ; U1.1K12 19.17,10.07 v1(19.17,10.07) 19.2,10.1 U1.1L11 ; v1(15.2,17.17) 15.1,17.07 U1.1AD20 ; U1.1R14 U1.1P14 ; U1.1P14 18.11,12.07 v1(18.13,12.05) ; U1.1P14 U1.1N14 ; U1.1AD18 16.1,17.07 v1(16.2,17.17) ; U1.A37 10.75,4.3 v1(10.47,4.02) 11.31,4.02 v1(11.37,4.08) ; U1.1AF24 U1.1AF26 ; U1.1J6 21.2,10.07 U1.1L7 U1.1L8 20.7,10.87 v1(20.49,11.08) ; v1(16.8,8.27) 16.5,8.57 U1.1G17 ; U1.1AA8 U1.1AA6 U1.1AA5 U1.1AA4 U1.1AA3 U1.1AC3 ; U1.1AA8 U1.1Y8 ; v1(21.2,17.17) 21.1,17.07 U1.1AD8 ; v1(19.12,13.67) 19.12,13.17 v1(19.15,13.14) 19.15,13.12 19.76,12.5 v1(19.86,12.5) ; U1.1AA18 U1.1AB18 15.28,16.07 15.22,16.13 v1(15.21,16.13) ; U1.1AA18 U1.1AA20 ; U1.AG1 25.7,15.02 v1(25.74,15.06) ; v1(17.2,17.17) 17.1,17.07 U1.1AD16 ; v1(23.28,9.07) 23.2,8.99 U1.1G3 ; U1.1AD12 19.1,17.07 v1(19.2,17.17) ; U1.1A21 U1.1B21 U1.1C21 13.86,6.57 13.81,6.52 13.25,6.52 U1.1C23 ; U1.1V23 U1.1T23
  TOP w0.254: U1.1V23 U1.1V24 U1.1V25 ; UD1.N13 19.11,37.73 v1(18.77,38.07) ; v1(15.25,32.47) 15.25,32.43 UD1.H6 ; UD1.G9 14.55,34.83 14.55,34.86 v1(14.55,34.86) ; UD1.G9 15.61,33.77 UD1.H8 15.61,33.67 15.71,33.58 16.21,33.58 UD1.J8 v1(16.66,33.22) ; UD1.G9 15.61,35.17 UD1.H10 ; UD1.L4 17.73,30.47 18.07,30.86 v1(18.07,30.86) UD1.L5 ; U1.1Y11 19.2,15.61 ; 19.2,15.61 19.21,15.61 19.66,15.61 U1.1AA10 ; 19.2,15.61 v1(19.2,15.62) 19.19,15.61 18.74,15.61 U1.1AA12 ; v1(19.46,34.02) UD1.N8 UD1.M8 18.09,33.26 v1(18.06,33.26) 18.06,33.22 UD1.M7 19.11,32.17 UD1.N6 ; v1(19.46,34.02) UD1.P8 19.81,33.64 20.17,33.28 v1(20.17,33.27) 20.18,33.26 20.18,33.2 UD1.R7 ; v1(19.46,34.02) 19.11,34.37 UD1.N9 18.76,34.82 ; UD1.F14 14.52,38.16 14.52,38.11 14.56,38.08 v1(14.56,38.07) 14.56,38.07 14.56,38.06 14.91,37.71 UD1.G13 ; U1.1F26 11.7,7.68 v1(11.58,7.55) 11.31,7.82 U1.J36 ; v1(23.19,17.07) 23.2,17.06 U1.1AC3 ; U1.1V21 U1.1U21 14.74,13.57 15.07,13.91 15.07,14.2 U1.1W20 U1.1AA20 14.03,16.24 14.02,16.24 13.7,16.56 U1.1AC22 13.47,16.57 v1(13.22,16.82) ; UD1.H3 UD1.J3 16.62,29.36 16.62,29.3 v1(16.66,29.27) ; UD1.H3 UD1.G3 ; UD1.H3 UD1.H4 15.61,30.53 v1(15.27,30.87) 14.91,31.23 UD1.G5 ; v1(21.2,17.17) 21.31,17.07 U1.1AD6 ; v1(21.74,13.09) 21.7,13.05 U1.1R6 ; UD1.Y4 24.01,30.57 UD1.W5 22.96,31.62 22.96,31.72 UD1.V6 22.65,32.08 v1(22.96,32.48) 22.61,32.83 UD1.V7 22.3,33.27 v1(22.27,33.27) 22.27,33.31 UD1.U8 21.91,33.65 v1(21.55,33.3) 21.21,33.64 UD1.T8 ; v1(22.7,5.45) 22.6,5.55 22.53,5.55 22.51,5.57 U1.1A5 ; U1.B23 16.35,5.1 v1(16.7,5.45) 16.33,5.45 U1.1A17 ; U1.AT30 13.55,18.55 13.25,18.25 12.88,18.25 U1.1AF24 ; 15.21,15.57 v1(15.21,16.13) ; U1.1AA14 U1.1AB14 17.23,16.07 v1(17.2,16.1) 16.7,15.6 U1.1AA16 ; U1.AF36 11.88,14.62 v1(12.04,14.46) 12.18,14.31 12.18,14.09 U1.1V25 ; UD1.R9 20.51,34.52 v1(20.16,34.86) 20.16,34.86 19.81,35.22 UD1.P10 ; U1.1AD22 13.55,17.07 13.31,16.82 v1(13.22,16.82) ; UD1.J7 v1(16.66,33.22) ; v1(16.66,33.22) UD1.K7 ; v1(16.66,33.22) 17.01,33.57 UD1.K8 UD1.K9 17.01,34.54 16.31,35.24 UD1.J10 ; CD10.2 25.99,34.35 ; UD1.L13 17.35,38.03 v1(17.35,38.06) ; v1(17.36,37.26) 17.37,37.26 17.37,37.21 UD1.L12 ; U1.1R6 U1.1R7 ; U1.1R6 22.2,12.07 U1.1N5 U1.1N4 22.78,11.49 v1(22.78,11.06) 22.78,10.65 U1.1L4 U1.1L5 U1.1J5 U1.1J6 ; v1(24.95,23.1) 24.93,23.1 24.9,23.13 ; U1.1AD10 19.31,17.07 v1(19.2,17.17) ; U1.1T22 U1.1T23 13.2,12.72 v1(13.29,12.63) ; v1(13.22,16.82) 12.95,16.82 U1.1AD24 12.7,16.92 v1(12.49,16.7) ; v1(17.35,39.67) 17.35,39.63 UD1.L15 ; v1(14.73,7.15) 14.63,7.15 U1.1E21 ; U1.1T25 12.2,13.48 v1(12.07,13.61) 12.05,13.63 12.05,13.92 U1.1V25 ; v1(16.2,14.11) 16.24,14.07 U1.1V16 U1.1W16 U1.1Y16 ; v1(23.82,13.07) 23.7,12.95 U1.1R2 ; v1(17.35,38.86) 17.35,38.83 UD1.L14 ; U1.1K22 U1.1K23 U1.1K24 ; U1.1B17 16.32,5.95 v1(16.7,5.95) 16.82,6.07 U1.1B15 U1.1C15 U1.1D15 ; UD1.P6 19.81,32.03 20.16,31.67 v1(20.16,31.66) 20.17,31.65 20.17,31.65 20.51,31.31 UD1.R5 ; UD1.L3 17.74,29.67 18.07,29.28 v1(18.07,29.27) 18.08,29.25 18.08,29.22 17.74,28.87 UD1.L2 17.6,28.77 17.6,28.18 UD1.L1 ; U1.1M22 U1.1M21 14.2,11.49 v1(14.13,11.57) ; U1.1G5 21.78,8.57 21.28,8.07 U1.1F7 U1.1E7 U1.1D7 U1.1C7 ; U1.1G5 U1.1E5 ; U1.1G5 U1.1G4 U1.1G3 ; v1(12.59,9.62) 12.59,9.96 U1.1K24 ; U1.1R9 19.92,12.57 v1(19.86,12.5) ; U1.1H14 U1.1H17 U1.1G17 v1(15.71,8.57) U1.1G19 U1.1H19 ; U1.1U4 22.68,13.59 22.68,14 22.73,14.05 v1(22.73,14.11) ; U1.1AD14 17.31,17.07 v1(17.2,17.17) ; U1.1K24 12.7,10.44 v1(12.8,10.54) ; v1(15.2,17.17) 15.31,17.07 U1.1AD18 ; UD1.B8 v1(11.76,34.02) UD1.C8 12.42,33.27 v1(12.46,33.26) 12.46,33.22 UD1.D7 ; v1(15.96,38.07) 16.31,37.72 UD1.J13 ; UD1.H12 v1(15.98,37.24) 16.31,36.91 UD1.J12 ; CD9.2 8.55,35.02 8.21,35.37 ; UD1.C11 11.78,36.4 11.78,36.44 11.77,36.45 11.77,36.46 v1(11.76,36.47) 11.75,36.46 11.72,36.46 11.41,36.77 UD1.B12 ; 17.3,26.41 17.24,26.47 CD7.2 ; U1.B26 15.15,5.08 14.89,5.35 14.85,5.35 v1(14.75,5.45) 14.63,5.57 U1.1A21 ; UD1.J15 16.01,39.57 16.01,39.61 v1(16.2,39.8) ; U1.1E5 21.79,7.57 v1(21.7,7.48) ; U1.1E5 U1.1D5 ; U1.A7 v1(22.75,4.11) ; v1(18.2,17.17) 18.31,17.07 U1.1AD12 ; UD1.L11 17.38,36.4 17.38,36.45 v1(17.37,36.46) ; UD1.Y12 24.01,36.77 UD1.W11 23.31,36.07 22.95,35.71 22.95,35.66 22.61,35.32 UD1.V10 22.61,35.22 v1(22.95,34.87) 22.92,34.87 UD1.V9 22.61,34.43 v1(22.98,34.06) 23.28,33.68 UD1.W8 v1(23.66,33.32) UD1.Y8 ; U1.1AD8 20.31,17.07 20.2,17.17 v1(20.2,17.18) ; UD1.N10 19.11,35.17 18.76,34.82 ; v1(15.26,36.47) 15.26,36.42 UD1.G11 ; 18.76,34.82 UD1.M9 ; v1(19.15,13.14) 19.08,13.07 U1.1T12 U1.1U12 19.02,13.57 v1(19.12,13.67) 19.2,13.75 U1.1V11 U1.1V10 20.2,14.57 U1.1W9 20.32,14.69 20.33,14.69 20.57,14.93 20.57,14.94 U1.1Y8 ; v1(19.44,28.46) 19.44,28.4 UD1.N1 ; UD1.G7 14.56,33.22 14.56,33.32 UD1.F8 UD1.E8 13.16,34.02 v1(13.16,34.06) 13.12,34.07 UD1.D9 12.45,34.83 v1(12.45,34.87) 12.48,34.87 12.49,34.87 UD1.D10 ; 9.36,32.81 9.48,32.69 CD8.2 ; UD1.E13 13.16,38.02 UD1.D14 12.81,38.53 v1(13.15,38.87) 13.15,38.93 13.5,39.27 UD1.E15 ; v1(25.55,36.1) 24.99,36.1 24.96,36.07 UD1.AA11 ; v1(17.64,4.24) 17.95,4.55 U1.A19 ; UD1.T2 21.21,28.97 UD1.U3 21.91,29.63 v1(22.26,29.28) 22.58,28.88 UD1.V2 ; v1(25.22,20.73) 26.38,21.89 26.38,23.37 v1(26.19,23.55) ; v1(10.21,31.06) 10.42,31.27 UD1.A5 ; U1.1AD16 16.31,17.07 v1(16.2,17.17) ; v1(25.3,31.38) 25.2,31.27 UD1.AA5 ; U1.1C17 U1.1D17 U1.1E17 ; U1.1AA17 U1.1Y17 ; U1.1AF26 11.69,18.05 v1(11.69,17.53) ; UD1.R13 v1(20.16,38.02) ; UD1.P13 v1(19.46,38.02) ; v1(10.21,36.07) UD1.A11 ; CD21.2 21.78,26.24 CD49.2 ; v1(12.45,11.57) 12.59,11.7 12.59,11.72 12.7,11.83 U1.1P24
  TOP w0.305: CD16.2 22.33,41.87 v1(22.34,41.87) ; v1(15.68,41.93) CD11.2 ; 21.91,37.77 UD1.U13 21.91,37.64 v1(22.26,37.28) ; 21.91,37.77 UD1.V14 ; 21.91,37.77 UD1.T14 v1(21.55,38.86) UD1.U15 ; UD1.N13 18.77,37.34 v1(18.77,37.27) 19.11,36.94 UD1.N12 v1(19.46,37.22) ; UD1.N13 19.46,37.32 v1(19.46,37.22) ; UD1.N13 v1(19.46,38.02) ; v1(17.35,38.86) 17.35,38.91 UD1.L15 ; v1(18.13,26.59) 17.49,26.59 17.35,26.45 17.26,26.45 ; UD1.D7 12.81,32.72 12.74,32.65 12.74,32.3 12.81,32.23 UD1.D6 12.81,31.97 UD1.C5 12.11,31.2 v1(11.78,30.87) 11.41,30.5 UD1.B4 ; UD1.F2 14.21,28.97 UD1.E3 ; UD1.R3 20.51,29.71 v1(20.16,30.06) 19.81,30.41 UD1.P4 v1(19.46,30.82) UD1.N4 18.91,30.27 18.91,29.87 UD1.N3 ; v1(17.36,37.26) 17.36,37.33 UD1.L13 ; CD1.2 v1(23.56,41.87) ; v1(18.76,39.66) 19.11,39.31 UD1.N15 ; UD1.E3 13.51,29.57 UD1.D2 13.51,28.17 UD1.E1 ; UD1.E3 13.51,29.72 v1(13.16,30.07) ; UD1.J1 16.31,27.99 v1(16.65,27.65) ; UD1.U1 21.91,27.82 v1(21.61,27.52) 21.41,27.32 21.41,26.64 CD49.2 ; v1(19.46,37.22) 19.81,37.57 UD1.P13 v1(20.16,38.02) ; v1(19.46,37.22) UD1.P12 19.81,36.81 v1(20.16,36.46) 20.51,36.11 UD1.R11 ; v1(8.74,32.74) 8.75,32.74 8.79,32.77 9.01,32.77 9.05,32.81 9.36,32.81 ; UD1.L14 17.71,38.42 v1(17.35,38.06) ; 25.99,34.35 25.99,34.23 v1(25.2,33.44) ; v1(17.37,36.46) 17.71,36.81 UD1.L12 ; v1(18.3,41.86) CD6.2
  TOP w0.381: v1(3.18,15.61) 3.26,15.53 C77.2 ; v1(4.3,19.42) 3.71,18.83 CD32.2 3.58,18.83 v1(3.09,18.34) ; UD1.U15 22.03,39.39 v1(22.03,39.84) ; U1.A28 v1(14.35,3.92) ; v1(3.23,16.53) 3.27,16.57 C78.2 ; C135.2 7.04,16.29 C134.2 v1(7.05,16.68)
  BOTTOM w0.114: v1(23.56,41.87) 23.68,42 24.83,42 26.43,40.4 26.43,26.75 26.19,26.52 v1(26.19,23.55)
  BOTTOM w0.127: CD35.2 14.65,18.19 14.71,18.14
  BOTTOM w0.254: C80.2 16.17,14.13 ; v1(18.07,19.46) 18.13,19.52 CD22.2 18.25,20.08 CD36.2 18.25,21.37 CD57.2 18.26,22.12 v1(17.8,22.57) ; v1(19.2,15.62) 19.2,15.45 CD27.2 ; v1(18.2,17.17) 18.43,17.17 18.57,17.04 ; v1(19.2,17.17) 19.09,17.17 18.76,16.84 ; C79.2 19.71,14.14 CD24.2 v1(19.12,13.67) ; v1(15.2,17.17) 15.1,17.27 15.03,17.27 14.71,17.6 14.71,18.14 ; CD34.2 18.07,14.11 v1(18.18,14) ; v1(13.16,27.69) 13.06,27.69 12.08,28.67 CD37.2 ; v1(11.69,17.53) 11.69,17.66 12.1,18.08 12.71,18.08 CD56.2 13.71,18.38 CD33.2 ; v1(15.25,32.47) 15.23,32.45 CD66.2 ; CD43.2 21.56,33.3 v1(21.55,33.3) ; v1(22.21,17.18) 22.09,17.18 21.74,16.83 21.74,15.76 21.69,15.71 21.69,15.01 21.18,15.01 21.02,14.85 ; 21.02,14.85 CD25.2 ; 21.02,14.85 CD23.2 ; CD55.2 15.33,15.66 C81.2 15.27,16.07 v1(15.21,16.13)
  BOTTOM w0.305: v1(21.61,27.52) 21.79,27.71 CD17.2 ; C83.2 18.97,13.52 v1(19.12,13.67) ; CD46.2 17.96,29.15 v1(18.07,29.27) ; CD59.2 23.31,40.79 v1(23.31,40.39) ; CD47.2 18.08,33.23 v1(18.06,33.26) ; CD52.2 22.28,29.26 v1(22.26,29.28) ; v1(12.45,34.87) 12.56,34.99 CD44.2 ; v1(11.78,30.87) 11.76,30.89 CD63.2 ; CD64.2 13.21,27.74 v1(13.16,27.69) ; v1(17.35,39.67) 17.31,39.71 CD48.2 ; v1(22.26,37.28) 22.15,37.39 CD50.2 ; v1(12.46,33.26) 12.43,33.24 CD45.2 ; CD19.2 v1(21.55,38.86) ; v1(20.16,36.46) 20.16,36.46 CD54.2 ; CD26.2 18.76,16.84 18.57,17.04 ; v1(13.52,39.89) 13.41,40 CD39.2 13.09,40 13.09,40.31 12.89,40.52 CD2.2 ; CD37.2 CD4.2 10.91,28.93 CD20.2 ; CD42.2 24.67,39.64 CD40.2 25.31,39.64 CD38.2 25.31,39.53 v1(25.55,39.29) 25.54,39.27 CD65.2 ; v1(18.77,38.07) 18.63,38.2 CD14.2 ; v1(13.15,38.87) 13.09,38.93 CD41.2 ; v1(25.55,36.1) 25.57,36.13 CD60.2 ; v1(13.16,30.07) 13.05,29.95 CD51.2 ; CD69.2 22.95,34.88 v1(22.95,34.87) ; CD53.2 14.5,38.13 v1(14.56,38.07) ; v1(18.76,39.66) 18.63,39.79 CD13.2 ; CD62.2 10.15,36.13 v1(10.21,36.07) ; v1(22.96,32.48) 22.94,32.46 CD58.2 ; CD15.2 17.35,36.45 v1(17.37,36.46) ; CD18.2 14.04,35.37 v1(14.55,34.86) ; v1(18.07,30.86) 17.95,30.98 CD67.2 ; CD12.2 16.54,33.11 v1(16.66,33.22) ; CD5.2 23.74,27.24 CD3.2 v1(24.25,27.23) ; C79.2 20.34,14.13 C82.2 ; CD61.2 25.53,31.15 v1(25.3,31.38) ; v1(20.16,34.86) 20.17,34.87 CD68.2 ; 16.17,14.13 v1(16.2,14.11)
  vias: v1(7.78,38.7) v1(9.4,40.46) v1(9.79,27.19) v1(10.13,6.8) v1(10.7,25.56) v1(12.44,4.11) v1(16.77,41.97) v1(17.38,41.99) v1(19.52,27.11) v1(22.96,41.91) v1(24.81,26) v1(26.28,11.15) v1(26.53,17.79) v1(26.84,20.23)
VCC09-VDD2L: length 33.4
  TOP w0.254: v1(16.67,28.47) 16.65,28.49 16.63,28.49 16.63,28.55 UD1.J2 UD1.H2 ; UD1.N2 v1(19.46,29.22) UD1.P2 ; v1(25.23,32.08) 25.19,32.08 25.19,32.07 UD1.AA6 UD1.Y6 ; CD7.1 16.41,26.47 16.41,26.48
  TOP w0.305: UD1.J14 16.31,38.52 v1(15.99,38.84) 15.62,38.47 UD1.H14 15.61,38.52 v1(15.26,38.87) ; UD1.Y10 UD1.AA10 25.06,34.92 v1(25.38,34.92) 25.66,35.2 CD10.1 ; UD1.N14 19.11,38.52 v1(19.42,38.83) 19.78,38.47 UD1.P14 19.81,38.53 v1(20.15,38.87) ; v1(8.71,34.22) 9.06,34.57
  TOP w0.381: v1(15.9,26.9) 16.35,26.45 16.41,26.45 16.41,26.48 17.5,27.57 19.14,27.57 19.16,27.59 19.45,27.59 v1(19.49,27.63) ; v1(19.58,40.26) 19.72,40.41 CD6.1 ; 9.06,34.57 9.05,34.57 CD9.1 9.81,34.86 10.22,35.27 UD1.A10 UD1.B10 ; v1(8.74,31.91) 8.9,32.08 CD8.1 10.7,32.08 UD1.A6 UD1.B6
  TOP w0.508: CD6.1 19.72,41.84 v1(19.72,41.84)
  L3 w0.381: v1(20.15,38.87) 20.15,38.75 20.2,38.75 20.78,38.17 22.06,38.17 22.73,37.5 22.73,37.48 25.28,34.92 v1(25.38,34.92) 24.68,34.22 24.68,32.63 v1(25.23,32.08)
  BOTTOM w0.305: v1(19.49,27.63) 19.01,28.11 19.01,28.77 v1(19.46,29.22)
  vias: v1(19.08,41.96)
VCC-DRAM: length 78.7
  TOP w0.254: 13.86,34.82 UD1.F9 ; 13.86,34.82 UD1.E9 13.15,34.83 v1(13.15,34.88) ; 13.86,34.82 v1(13.86,34.84) 13.88,34.85 UD1.F10 ; UD1.M11 v1(18.76,36.42) UD1.N11 ; UD1.M11 18.09,36.39 18.09,36.46 v1(18.08,36.47) 18.11,36.47 18.41,36.77 UD1.M12 18.41,36.9 18.09,37.22 18.09,37.25 v1(18.07,37.27) 18.12,37.27 18.41,37.56 UD1.M13 18.41,37.75 v1(18.08,38.08) 18.41,38.41 UD1.M14 18.08,38.8 18.08,38.84 v1(18.06,38.86) 18.1,38.86 18.41,39.17 UD1.M15 18.04,39.64 v1(18.04,39.68) ; UD1.M11 18.06,35.72 v1(18.06,35.62) ; v1(18.06,31.66) 18.03,31.66 UD1.L6 18.07,32.43 18.07,32.46 ; v1(18.06,31.66) 18.08,31.64 18.08,31.6 UD1.M5 ; v1(18.06,31.66) 18.1,31.66 18.41,31.97 UD1.M6 ; v1(23.66,34.83) 23.65,34.82 23.65,34.82 UD1.W9 v1(23.67,34.11) 24.01,34.45 UD1.Y9 UD1.AA9 UD1.AA8 UD1.AA7 UD1.Y7 UD1.W7 23.28,32.88 v1(22.98,33.27) 22.61,33.64 UD1.V8 22.29,34.08 v1(22.27,34.08) 22.27,34.11 UD1.U9 ; 11.06,33.22 UD1.B7 v1(11.76,33.22) UD1.C7 ; 11.06,33.22 UD1.A7 ; 11.06,33.22 UD1.A8 11.08,34.08 ; 13.51,32.85 UD1.E7 13.17,33.21 v1(13.17,33.28) 13.17,33.28 13.11,33.28 UD1.D8 12.45,34.03 v1(12.45,34.06) 12.42,34.07 UD1.C9 ; 13.51,32.85 13.51,32.82 13.88,32.44 ; 13.51,32.85 13.2,32.54 13.2,32.51 v1(13.17,32.47) ; v1(21.56,32.48) 21.21,32.83 UD1.T7 ; v1(21.56,32.48) 21.25,32.08 UD1.T6 ; v1(21.56,32.48) 21.91,32.82 UD1.U7 22.24,32.54 22.24,32.5 v1(22.25,32.48) ; 11.08,34.08 UD1.A9 ; 11.08,34.08 UD1.B9 ; v1(18.71,14.64) 18.78,14.57 U1.1W11 ; UD1.M10 v1(18.06,35.62) ; v1(18.06,35.62) UD1.L10 ; UD1.M5 UD1.N5 ; UD1.M5 18.52,31.16 18.52,30.58 UD1.M4 18.09,30.06 v1(18.06,30.06) 18.08,30.05 18.08,30.04 18.41,29.71 UD1.M3 18.48,29.6 18.48,28.94 UD1.M2 18.09,28.46 v1(18.07,28.46) 18.41,28.12 UD1.M1 ; v1(16.66,31.62) 17.01,31.97 UD1.K6 16.71,32.37 16.71,32.42 v1(16.66,32.46) ; v1(16.66,31.62) UD1.K5 ; v1(16.66,31.62) UD1.J5 ; UD1.J11 16.65,36.42 16.65,36.43 ; UD1.U9 v1(21.56,34.12) UD1.T9 ; UD1.U9 21.83,34.48 21.54,34.86 v1(21.54,34.87) 21.53,34.87 21.21,35.19 UD1.T10 ; v1(20.16,15.1) 20.16,15.04 19.7,14.59 U1.1W10 ; 16.65,36.43 16.65,36.46 v1(16.66,36.46) 16.66,36.46 16.69,36.46 17.01,36.77 UD1.K12 16.65,37.23 16.65,37.27 v1(16.66,37.27) 16.67,37.28 16.71,37.28 17.01,37.57 UD1.K13 16.66,38.02 v1(16.66,38.07) 16.66,38.07 16.66,38.12 UD1.K14 16.66,38.82 16.66,38.86 16.66,38.86 v1(16.66,38.87) 16.66,38.87 16.66,38.93 UD1.K15 16.79,39.49 v1(16.79,39.73) ; 16.65,36.43 UD1.K11 16.64,35.71 16.64,35.68 v1(16.65,35.68) 16.66,35.67 16.66,35.62 UD1.K10 ; UD1.K3 17.09,29.59 17.09,28.95 UD1.K2 17.1,28.79 17.1,28.64 17.1,28.32 17.1,28.16 UD1.K1 ; UD1.F6 14.21,32.12 13.88,32.44 ; UD1.L9 18.02,34.07 18.05,34.06 v1(18.06,34.06) 18.05,34.06 18.05,34.01 UD1.L8 17.53,33.49 17.53,33.05 UD1.L7 18.02,32.47 18.05,32.46 v1(18.06,32.46) ; 13.88,32.44 14.21,32.77 UD1.F7
  TOP w0.305: v1(18.06,32.46) 18.41,32.12 UD1.M6 ; v1(23.66,34.83) 24.01,34.49 UD1.Y9 ; UD1.K10 UD1.L10 17.71,34.98 17.7,34.97 17.7,34.68 17.71,34.67 UD1.L9 ; CD21.1 20.33,25.67 v1(19.7,25.67) ; UD1.K5 UD1.K4 UD1.K3 ; v1(21.54,34.87) 21.21,34.54 UD1.T9 ; 17.1,40.68 18.04,39.74 v1(18.04,39.68) ; UD1.L6 UD1.K6 ; UD1.B9 UD1.C9
  TOP w0.381: CD11.1 17.1,40.58 16.79,40.27 v1(16.79,39.73)
  BOTTOM w0.076: 19.81,36.01 19.81,29.57 19.84,29.54 ; 19.81,38.51 19.81,36.82 ; 19.13,38.51 19.13,36.75
  BOTTOM w0.114: 15.59,35.51 15.61,35.54 15.61,39
  BOTTOM w0.254: v1(21.56,34.12) 21.56,34.12
  BOTTOM w0.305: CD13.1 18.13,39.76 v1(18.04,39.68) ; CD12.1 16.52,32.61 v1(16.66,32.46) ; CD15.1 16.73,35.59 v1(16.65,35.68) ; CD46.1 17.88,28.65 v1(18.07,28.46) ; CD44.1 13.06,34.97 v1(13.15,34.88) ; CD45.1 12.93,32.72 v1(13.17,32.47) ; CD48.1 16.81,39.75 v1(16.79,39.73) ; CD47.1 18.34,32.73 v1(18.06,32.46) ; v1(18.06,38.86) 18.14,38.93 CD14.1
